# EAGLE board Qwiic_Haptic_Driver_DA7280-Panel (EAGLE 9.6.2), part 1 of 5
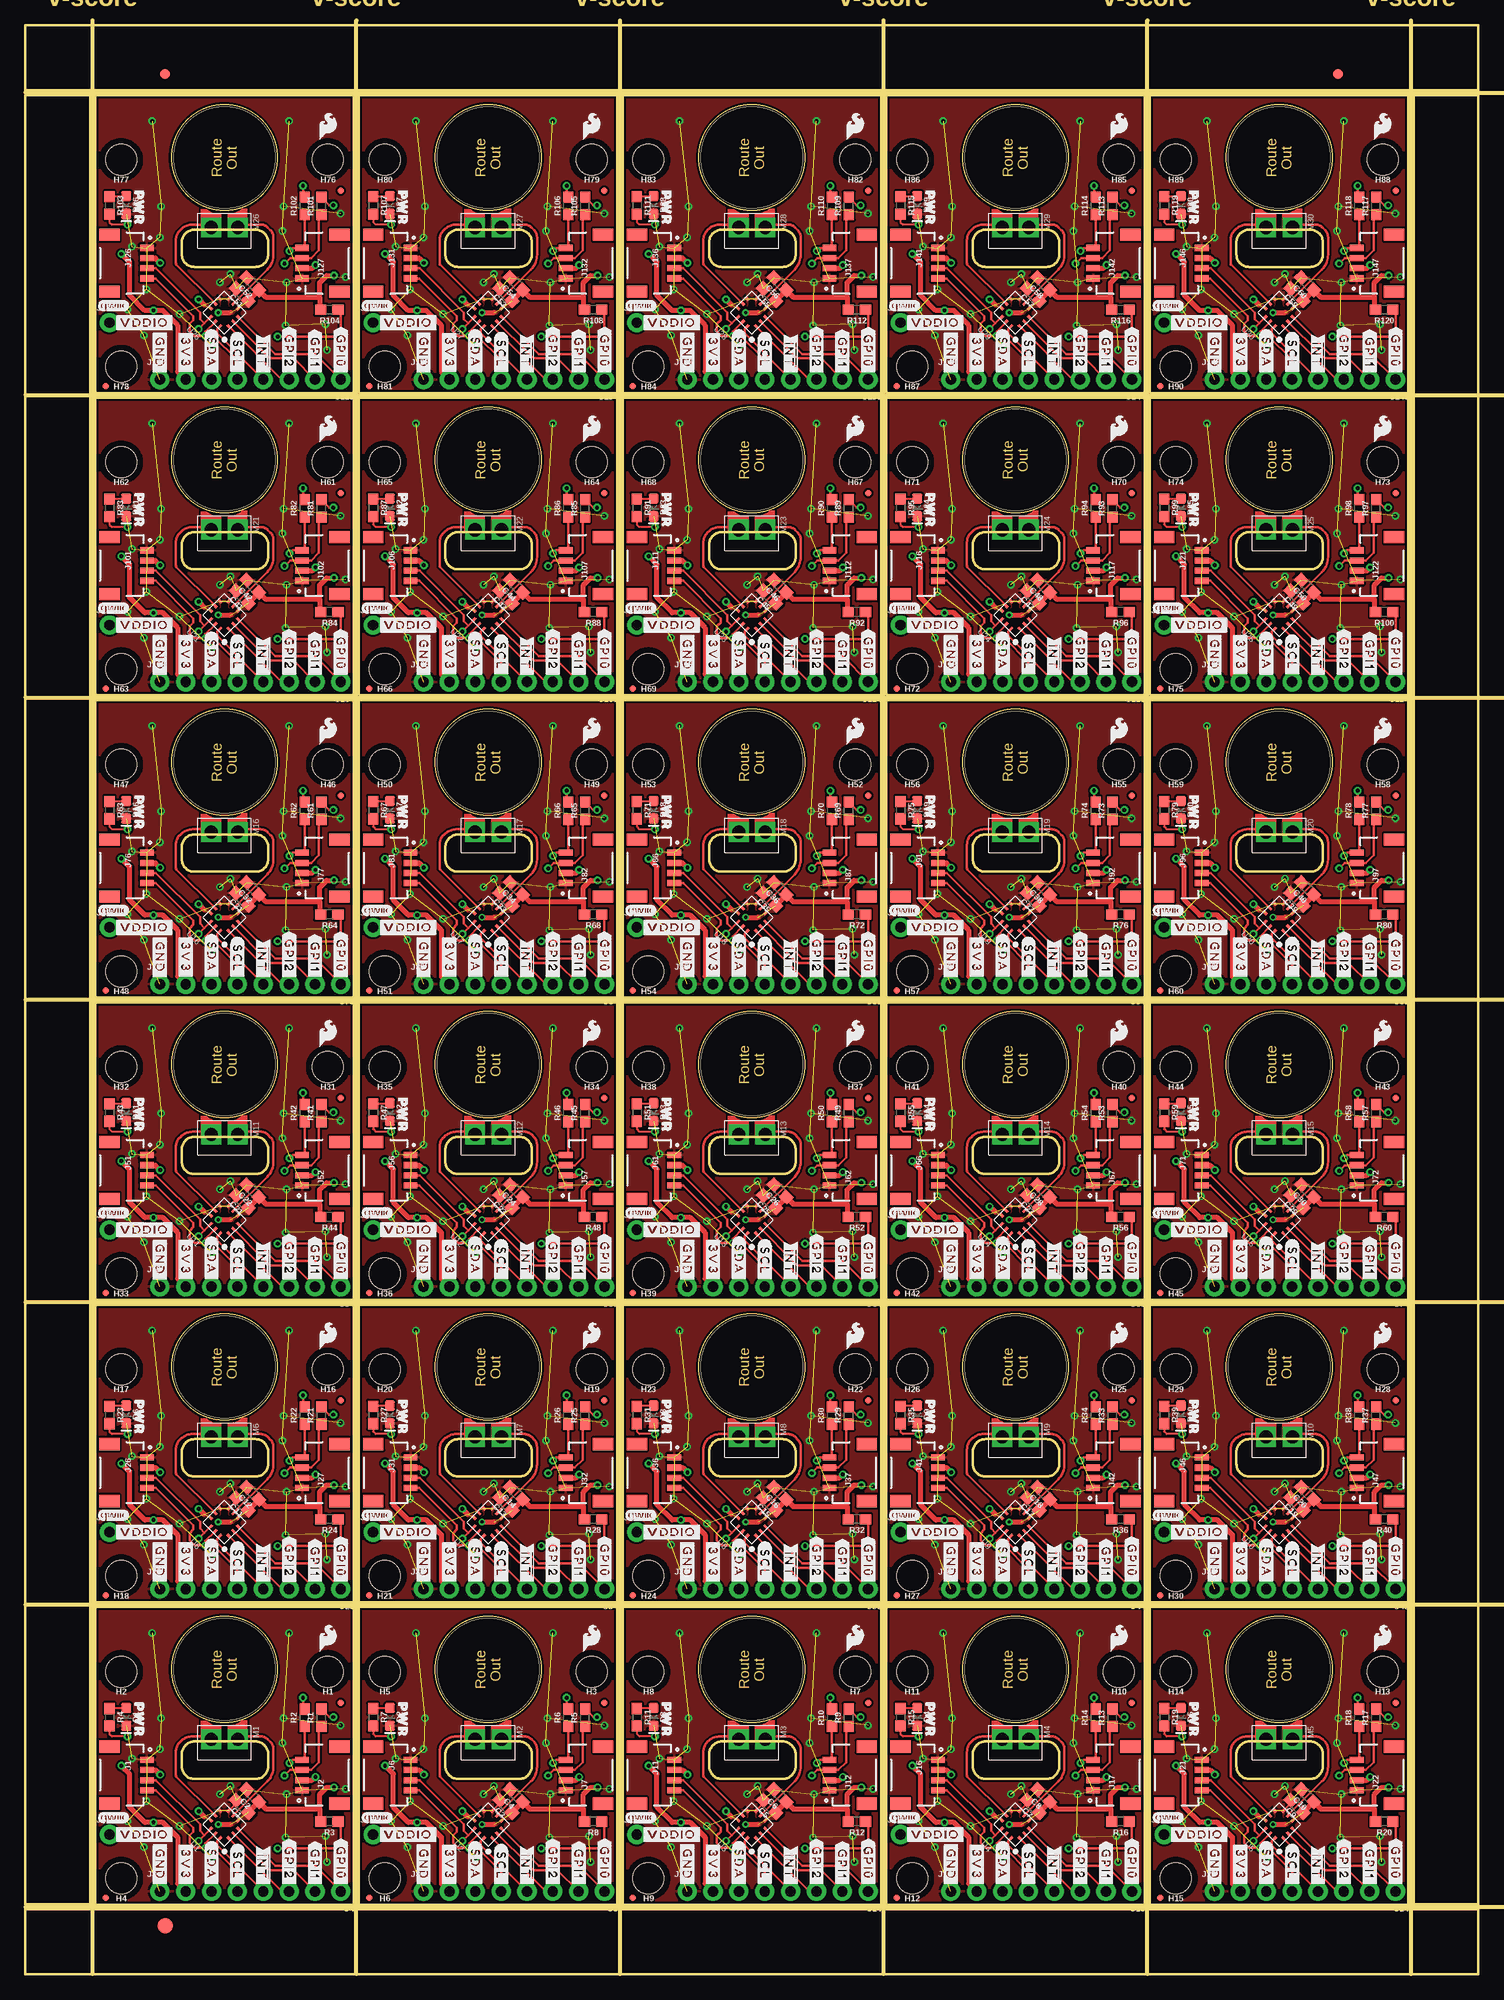
[diagram p0: board, top side]
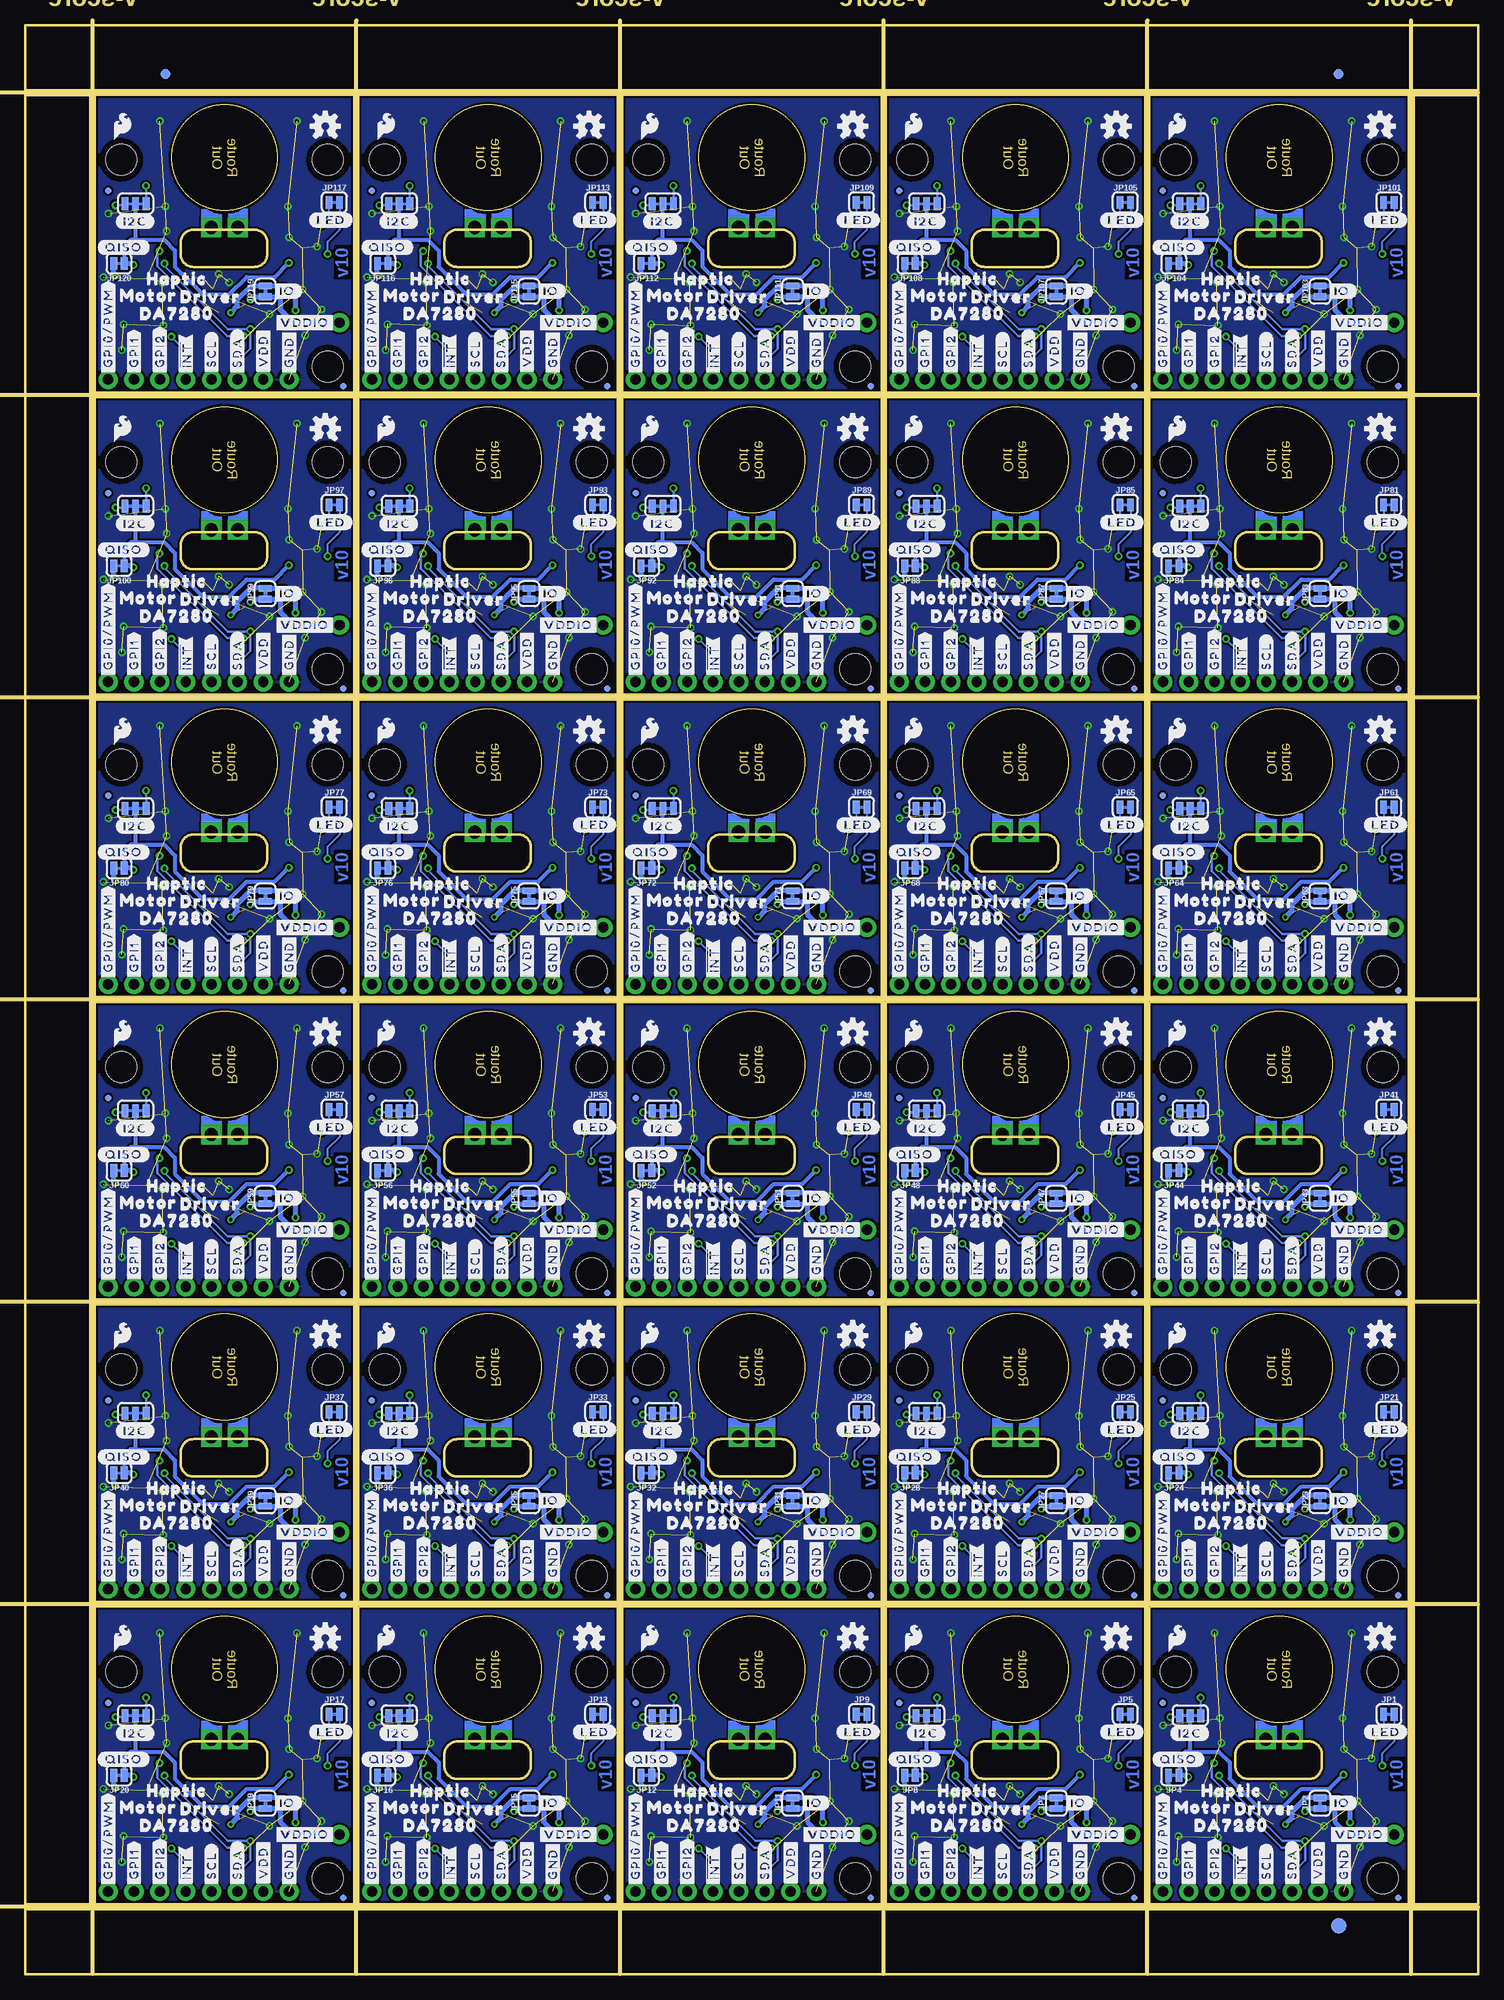
[diagram p1: board, bottom side, seen from below]

Size 142.75 x 191.52 mm. Coordinates in mm from the lower left corner, seen from the top.
Outline: 376 segments
Copper layers (1*16): Top 0.035mm / dielectric 1.5mm / Bottom 0.035mm
Design rules "Qwiic_Haptic_Driver_DA7280": minimum track width 7mil, minimum drill 15mil, track to track 7mil, track to pad 7mil, pad to pad 7mil, via to via 7mil, smd to smd 7mil, copper to edge 7mil, drill to drill 7mil, minimum pad ring 7mil, minimum via ring 7mil, stop-mask expansion 4mil, vias tented up to drill 25mil, thermal gap 10mil
tRestrict: area 19.4,15.2 to 19.7,15.3; area 22.4,18.7 to 22.6,18.8; area 45.3,15.2 to 45.6,15.3; area 48.3,18.7 to 48.5,18.8; area 71.2,15.2 to 71.6,15.3; area 74.2,18.7 to 74.4,18.8; area 97.1,15.2 to 97.5,15.3; area 100.1,18.7 to 100.3,18.8; area 123,15.2 to 123.4,15.3; area 126,18.7 to 126.2,18.8; area 19.4,44.9 to 19.7,45.1; area 22.4,48.4 to 22.6,48.6; 48 more areas
Milling: 13 lines

## Footprints (pad centres in the part's own frame; a part is rotated, then mirrored left to right if it is on the bottom)
0603 = smd 1.1 x 1: 1 -0.85,0; 2 0.85,0
LED-0603 = smd 1 x 1: A -0.877,0; C 0.877,0
FIDUCIAL-1X2 = smd 1 x 1: 1 0,0
FIDUCIAL-1.5X3 = smd 1.5 x 1.5: 1 0,0
FIDUCIAL-MICRO = smd 0.635 x 0.635: 1 0,0
STAND-OFF-TIGHT = hole 3.048: 0,0
JST04_1MM_RA = smd 0.6 x 1.35: 1 -1.5,0; 2 -0.5,0; 3 0.5,0; 4 1.5,0 | smd 1.2 x 2: NC1 2.8,-3.675; NC2 -2.8,-3.675
1X04_NO_SILK = drill 1.016 pad 1.88: 1 0,0; 2 2.54,0; 3 5.08,0; 4 7.62,0
1X01_NO_SILK = drill 1.016 pad 1.88: 1 0,0
SMT-JUMPER_2_NC_TRACE_SILK = smd 0.66 x 1.27: 1 -0.521,0; 2 0.521,0
SMT-JUMPER_3_2-NC_TRACE_SILK = smd 0.66 x 1.27: 1 -1.041,0; 2 0,0; 3 1.041,0
COIN_VIBRATION_MOTOR_CASTEL = drill 1.3 square: P$1 6.87,1.31; P$2 6.87,-1.29
QFN_DA7280 = smd 0.5 x 0.25: P1 -1.32,0.68; P2 -1.32,0.03; P3 -1.32,-0.62; P7 1.28,-0.62; P8 1.28,0.03; P9 1.28,0.68 | smd 0.25 x 0.5: P4 -0.67,-1.27; P5 -0.02,-1.27; P6 0.63,-1.27; P10 0.63,1.33; P11 -0.02,1.33; P12 -0.67,1.33

## Placement (x,y rotation side)
C1  0.1uF  [0603]  21.3,16.48 135 top
C2  4.7uF  [0603]  22.34,17.53 135 top
C3  0.1uF  [0603]  47.21,16.48 135 top
C4  4.7uF  [0603]  48.25,17.53 135 top
C5  0.1uF  [0603]  73.12,16.48 135 top
C6  4.7uF  [0603]  74.15,17.53 135 top
C7  0.1uF  [0603]  99.03,16.48 135 top
C8  4.7uF  [0603]  100.06,17.53 135 top
C9  0.1uF  [0603]  124.94,16.48 135 top
C10  4.7uF  [0603]  125.97,17.53 135 top
C11  0.1uF  [0603]  21.3,46.19 135 top
C12  4.7uF  [0603]  22.34,47.25 135 top
C13  0.1uF  [0603]  47.21,46.19 135 top
C14  4.7uF  [0603]  48.25,47.25 135 top
C15  0.1uF  [0603]  73.12,46.19 135 top
C16  4.7uF  [0603]  74.15,47.25 135 top
C17  0.1uF  [0603]  99.03,46.19 135 top
C18  4.7uF  [0603]  100.06,47.25 135 top
C19  0.1uF  [0603]  124.94,46.19 135 top
C20  4.7uF  [0603]  125.97,47.25 135 top
C21  0.1uF  [0603]  21.3,75.91 135 top
C22  4.7uF  [0603]  22.34,76.97 135 top
C23  0.1uF  [0603]  47.21,75.91 135 top
C24  4.7uF  [0603]  48.25,76.97 135 top
C25  0.1uF  [0603]  73.12,75.91 135 top
C26  4.7uF  [0603]  74.15,76.97 135 top
C27  0.1uF  [0603]  99.03,75.91 135 top
C28  4.7uF  [0603]  100.06,76.97 135 top
C29  0.1uF  [0603]  124.94,75.91 135 top
C30  4.7uF  [0603]  125.97,76.97 135 top
C31  0.1uF  [0603]  21.3,105.63 135 top
C32  4.7uF  [0603]  22.34,106.68 135 top
C33  0.1uF  [0603]  47.21,105.63 135 top
C34  4.7uF  [0603]  48.25,106.68 135 top
C35  0.1uF  [0603]  73.12,105.63 135 top
C36  4.7uF  [0603]  74.15,106.68 135 top
C37  0.1uF  [0603]  99.03,105.63 135 top
C38  4.7uF  [0603]  100.06,106.68 135 top
C39  0.1uF  [0603]  124.94,105.63 135 top
C40  4.7uF  [0603]  125.97,106.68 135 top
C41  0.1uF  [0603]  21.3,135.35 135 top
C42  4.7uF  [0603]  22.34,136.4 135 top
C43  0.1uF  [0603]  47.21,135.35 135 top
C44  4.7uF  [0603]  48.25,136.4 135 top
C45  0.1uF  [0603]  73.12,135.35 135 top
C46  4.7uF  [0603]  74.15,136.4 135 top
C47  0.1uF  [0603]  99.03,135.35 135 top
C48  4.7uF  [0603]  100.06,136.4 135 top
C49  0.1uF  [0603]  124.94,135.35 135 top
C50  4.7uF  [0603]  125.97,136.4 135 top
C51  0.1uF  [0603]  21.3,165.07 135 top
C52  4.7uF  [0603]  22.34,166.12 135 top
C53  0.1uF  [0603]  47.21,165.07 135 top
C54  4.7uF  [0603]  48.25,166.12 135 top
C55  0.1uF  [0603]  73.12,165.07 135 top
C56  4.7uF  [0603]  74.15,166.12 135 top
C57  0.1uF  [0603]  99.03,165.07 135 top
C58  4.7uF  [0603]  100.06,166.12 135 top
C59  0.1uF  [0603]  124.94,165.07 135 top
C60  4.7uF  [0603]  125.97,166.12 135 top
D1  RED  [LED-0603]  9.91,25.27 270 top
D2  RED  [LED-0603]  35.81,25.27 270 top
D3  RED  [LED-0603]  61.72,25.27 270 top
D4  RED  [LED-0603]  87.63,25.27 270 top
D5  RED  [LED-0603]  113.54,25.27 270 top
D6  RED  [LED-0603]  9.91,54.99 270 top
D7  RED  [LED-0603]  35.81,54.99 270 top
D8  RED  [LED-0603]  61.72,54.99 270 top
D9  RED  [LED-0603]  87.63,54.99 270 top
D10  RED  [LED-0603]  113.54,54.99 270 top
D11  RED  [LED-0603]  9.91,84.71 270 top
D12  RED  [LED-0603]  35.81,84.71 270 top
D13  RED  [LED-0603]  61.72,84.71 270 top
D14  RED  [LED-0603]  87.63,84.71 270 top
D15  RED  [LED-0603]  113.54,84.71 270 top
D16  RED  [LED-0603]  9.91,114.43 270 top
D17  RED  [LED-0603]  35.81,114.43 270 top
D18  RED  [LED-0603]  61.72,114.43 270 top
D19  RED  [LED-0603]  87.63,114.43 270 top
D20  RED  [LED-0603]  113.54,114.43 270 top
D21  RED  [LED-0603]  9.91,144.15 270 top
D22  RED  [LED-0603]  35.81,144.15 270 top
D23  RED  [LED-0603]  61.72,144.15 270 top
D24  RED  [LED-0603]  87.63,144.15 270 top
D25  RED  [LED-0603]  113.54,144.15 270 top
D26  RED  [LED-0603]  9.91,173.86 270 top
D27  RED  [LED-0603]  35.81,173.86 270 top
D28  RED  [LED-0603]  61.72,173.86 270 top
D29  RED  [LED-0603]  87.63,173.86 270 top
D30  RED  [LED-0603]  113.54,173.86 270 top
E$1  [FIDUCIAL-1X2]  13.72,186.75 0 top
E$2  [FIDUCIAL-1X2]  13.72,186.75 0 bottom
E$3  [FIDUCIAL-1X2]  128.97,186.75 0 top
E$4  [FIDUCIAL-1X2]  128.97,186.75 0 bottom
E$5  [FIDUCIAL-1.5X3]  13.72,4.76 0 top
E$6  [FIDUCIAL-1.5X3]  13.72,4.76 0 bottom
FD1  FIDUCIALUFIDUCIAL  [FIDUCIAL-MICRO]  7.87,7.49 180 top
FD2  FIDUCIALUFIDUCIAL  [FIDUCIAL-MICRO]  7.87,7.49 180 bottom
FD3  FIDUCIALUFIDUCIAL  [FIDUCIAL-MICRO]  30.99,26.67 180 top
FD4  FIDUCIALUFIDUCIAL  [FIDUCIAL-MICRO]  30.99,26.67 180 bottom
FD5  FIDUCIALUFIDUCIAL  [FIDUCIAL-MICRO]  33.78,7.49 180 top
FD6  FIDUCIALUFIDUCIAL  [FIDUCIAL-MICRO]  33.78,7.49 180 bottom
FD7  FIDUCIALUFIDUCIAL  [FIDUCIAL-MICRO]  56.9,26.67 180 top
FD8  FIDUCIALUFIDUCIAL  [FIDUCIAL-MICRO]  56.9,26.67 180 bottom
FD9  FIDUCIALUFIDUCIAL  [FIDUCIAL-MICRO]  59.69,7.49 180 top
FD10  FIDUCIALUFIDUCIAL  [FIDUCIAL-MICRO]  59.69,7.49 180 bottom
FD11  FIDUCIALUFIDUCIAL  [FIDUCIAL-MICRO]  82.8,26.67 180 top
FD12  FIDUCIALUFIDUCIAL  [FIDUCIAL-MICRO]  82.8,26.67 180 bottom
FD13  FIDUCIALUFIDUCIAL  [FIDUCIAL-MICRO]  85.6,7.49 180 top
FD14  FIDUCIALUFIDUCIAL  [FIDUCIAL-MICRO]  85.6,7.49 180 bottom
FD15  FIDUCIALUFIDUCIAL  [FIDUCIAL-MICRO]  108.71,26.67 180 top
FD16  FIDUCIALUFIDUCIAL  [FIDUCIAL-MICRO]  108.71,26.67 180 bottom
FD17  FIDUCIALUFIDUCIAL  [FIDUCIAL-MICRO]  111.51,7.49 180 top
FD18  FIDUCIALUFIDUCIAL  [FIDUCIAL-MICRO]  111.51,7.49 180 bottom
FD19  FIDUCIALUFIDUCIAL  [FIDUCIAL-MICRO]  134.62,26.67 180 top
FD20  FIDUCIALUFIDUCIAL  [FIDUCIAL-MICRO]  134.62,26.67 180 bottom
FD21  FIDUCIALUFIDUCIAL  [FIDUCIAL-MICRO]  7.87,37.21 180 top
FD22  FIDUCIALUFIDUCIAL  [FIDUCIAL-MICRO]  7.87,37.21 180 bottom
FD23  FIDUCIALUFIDUCIAL  [FIDUCIAL-MICRO]  30.99,56.39 180 top
FD24  FIDUCIALUFIDUCIAL  [FIDUCIAL-MICRO]  30.99,56.39 180 bottom
FD25  FIDUCIALUFIDUCIAL  [FIDUCIAL-MICRO]  33.78,37.21 180 top
FD26  FIDUCIALUFIDUCIAL  [FIDUCIAL-MICRO]  33.78,37.21 180 bottom
FD27  FIDUCIALUFIDUCIAL  [FIDUCIAL-MICRO]  56.9,56.39 180 top
FD28  FIDUCIALUFIDUCIAL  [FIDUCIAL-MICRO]  56.9,56.39 180 bottom
FD29  FIDUCIALUFIDUCIAL  [FIDUCIAL-MICRO]  59.69,37.21 180 top
FD30  FIDUCIALUFIDUCIAL  [FIDUCIAL-MICRO]  59.69,37.21 180 bottom
FD31  FIDUCIALUFIDUCIAL  [FIDUCIAL-MICRO]  82.8,56.39 180 top
FD32  FIDUCIALUFIDUCIAL  [FIDUCIAL-MICRO]  82.8,56.39 180 bottom
FD33  FIDUCIALUFIDUCIAL  [FIDUCIAL-MICRO]  85.6,37.21 180 top
FD34  FIDUCIALUFIDUCIAL  [FIDUCIAL-MICRO]  85.6,37.21 180 bottom
FD35  FIDUCIALUFIDUCIAL  [FIDUCIAL-MICRO]  108.71,56.39 180 top
FD36  FIDUCIALUFIDUCIAL  [FIDUCIAL-MICRO]  108.71,56.39 180 bottom
FD37  FIDUCIALUFIDUCIAL  [FIDUCIAL-MICRO]  111.51,37.21 180 top
FD38  FIDUCIALUFIDUCIAL  [FIDUCIAL-MICRO]  111.51,37.21 180 bottom
FD39  FIDUCIALUFIDUCIAL  [FIDUCIAL-MICRO]  134.62,56.39 180 top
FD40  FIDUCIALUFIDUCIAL  [FIDUCIAL-MICRO]  134.62,56.39 180 bottom
FD41  FIDUCIALUFIDUCIAL  [FIDUCIAL-MICRO]  7.87,66.93 180 top
FD42  FIDUCIALUFIDUCIAL  [FIDUCIAL-MICRO]  7.87,66.93 180 bottom
FD43  FIDUCIALUFIDUCIAL  [FIDUCIAL-MICRO]  30.99,86.11 180 top
FD44  FIDUCIALUFIDUCIAL  [FIDUCIAL-MICRO]  30.99,86.11 180 bottom
FD45  FIDUCIALUFIDUCIAL  [FIDUCIAL-MICRO]  33.78,66.93 180 top
FD46  FIDUCIALUFIDUCIAL  [FIDUCIAL-MICRO]  33.78,66.93 180 bottom
FD47  FIDUCIALUFIDUCIAL  [FIDUCIAL-MICRO]  56.9,86.11 180 top
FD48  FIDUCIALUFIDUCIAL  [FIDUCIAL-MICRO]  56.9,86.11 180 bottom
FD49  FIDUCIALUFIDUCIAL  [FIDUCIAL-MICRO]  59.69,66.93 180 top
FD50  FIDUCIALUFIDUCIAL  [FIDUCIAL-MICRO]  59.69,66.93 180 bottom
FD51  FIDUCIALUFIDUCIAL  [FIDUCIAL-MICRO]  82.8,86.11 180 top
FD52  FIDUCIALUFIDUCIAL  [FIDUCIAL-MICRO]  82.8,86.11 180 bottom
FD53  FIDUCIALUFIDUCIAL  [FIDUCIAL-MICRO]  85.6,66.93 180 top
FD54  FIDUCIALUFIDUCIAL  [FIDUCIAL-MICRO]  85.6,66.93 180 bottom
FD55  FIDUCIALUFIDUCIAL  [FIDUCIAL-MICRO]  108.71,86.11 180 top
FD56  FIDUCIALUFIDUCIAL  [FIDUCIAL-MICRO]  108.71,86.11 180 bottom
FD57  FIDUCIALUFIDUCIAL  [FIDUCIAL-MICRO]  111.51,66.93 180 top
FD58  FIDUCIALUFIDUCIAL  [FIDUCIAL-MICRO]  111.51,66.93 180 bottom
FD59  FIDUCIALUFIDUCIAL  [FIDUCIAL-MICRO]  134.62,86.11 180 top
FD60  FIDUCIALUFIDUCIAL  [FIDUCIAL-MICRO]  134.62,86.11 180 bottom
FD61  FIDUCIALUFIDUCIAL  [FIDUCIAL-MICRO]  7.87,96.65 180 top
FD62  FIDUCIALUFIDUCIAL  [FIDUCIAL-MICRO]  7.87,96.65 180 bottom
FD63  FIDUCIALUFIDUCIAL  [FIDUCIAL-MICRO]  30.99,115.82 180 top
FD64  FIDUCIALUFIDUCIAL  [FIDUCIAL-MICRO]  30.99,115.82 180 bottom
FD65  FIDUCIALUFIDUCIAL  [FIDUCIAL-MICRO]  33.78,96.65 180 top
FD66  FIDUCIALUFIDUCIAL  [FIDUCIAL-MICRO]  33.78,96.65 180 bottom
FD67  FIDUCIALUFIDUCIAL  [FIDUCIAL-MICRO]  56.9,115.82 180 top
FD68  FIDUCIALUFIDUCIAL  [FIDUCIAL-MICRO]  56.9,115.82 180 bottom
FD69  FIDUCIALUFIDUCIAL  [FIDUCIAL-MICRO]  59.69,96.65 180 top
FD70  FIDUCIALUFIDUCIAL  [FIDUCIAL-MICRO]  59.69,96.65 180 bottom
FD71  FIDUCIALUFIDUCIAL  [FIDUCIAL-MICRO]  82.8,115.82 180 top
FD72  FIDUCIALUFIDUCIAL  [FIDUCIAL-MICRO]  82.8,115.82 180 bottom
FD73  FIDUCIALUFIDUCIAL  [FIDUCIAL-MICRO]  85.6,96.65 180 top
FD74  FIDUCIALUFIDUCIAL  [FIDUCIAL-MICRO]  85.6,96.65 180 bottom
FD75  FIDUCIALUFIDUCIAL  [FIDUCIAL-MICRO]  108.71,115.82 180 top
FD76  FIDUCIALUFIDUCIAL  [FIDUCIAL-MICRO]  108.71,115.82 180 bottom
FD77  FIDUCIALUFIDUCIAL  [FIDUCIAL-MICRO]  111.51,96.65 180 top
FD78  FIDUCIALUFIDUCIAL  [FIDUCIAL-MICRO]  111.51,96.65 180 bottom
FD79  FIDUCIALUFIDUCIAL  [FIDUCIAL-MICRO]  134.62,115.82 180 top
FD80  FIDUCIALUFIDUCIAL  [FIDUCIAL-MICRO]  134.62,115.82 180 bottom
FD81  FIDUCIALUFIDUCIAL  [FIDUCIAL-MICRO]  7.87,126.37 180 top
FD82  FIDUCIALUFIDUCIAL  [FIDUCIAL-MICRO]  7.87,126.37 180 bottom
FD83  FIDUCIALUFIDUCIAL  [FIDUCIAL-MICRO]  30.99,145.54 180 top
FD84  FIDUCIALUFIDUCIAL  [FIDUCIAL-MICRO]  30.99,145.54 180 bottom
FD85  FIDUCIALUFIDUCIAL  [FIDUCIAL-MICRO]  33.78,126.37 180 top
FD86  FIDUCIALUFIDUCIAL  [FIDUCIAL-MICRO]  33.78,126.37 180 bottom
FD87  FIDUCIALUFIDUCIAL  [FIDUCIAL-MICRO]  56.9,145.54 180 top
FD88  FIDUCIALUFIDUCIAL  [FIDUCIAL-MICRO]  56.9,145.54 180 bottom
FD89  FIDUCIALUFIDUCIAL  [FIDUCIAL-MICRO]  59.69,126.37 180 top
FD90  FIDUCIALUFIDUCIAL  [FIDUCIAL-MICRO]  59.69,126.37 180 bottom
FD91  FIDUCIALUFIDUCIAL  [FIDUCIAL-MICRO]  82.8,145.54 180 top
FD92  FIDUCIALUFIDUCIAL  [FIDUCIAL-MICRO]  82.8,145.54 180 bottom
FD93  FIDUCIALUFIDUCIAL  [FIDUCIAL-MICRO]  85.6,126.37 180 top
FD94  FIDUCIALUFIDUCIAL  [FIDUCIAL-MICRO]  85.6,126.37 180 bottom
FD95  FIDUCIALUFIDUCIAL  [FIDUCIAL-MICRO]  108.71,145.54 180 top
FD96  FIDUCIALUFIDUCIAL  [FIDUCIAL-MICRO]  108.71,145.54 180 bottom
FD97  FIDUCIALUFIDUCIAL  [FIDUCIAL-MICRO]  111.51,126.37 180 top
FD98  FIDUCIALUFIDUCIAL  [FIDUCIAL-MICRO]  111.51,126.37 180 bottom
FD99  FIDUCIALUFIDUCIAL  [FIDUCIAL-MICRO]  134.62,145.54 180 top
FD100  FIDUCIALUFIDUCIAL  [FIDUCIAL-MICRO]  134.62,145.54 180 bottom
FD101  FIDUCIALUFIDUCIAL  [FIDUCIAL-MICRO]  7.87,156.08 180 top
FD102  FIDUCIALUFIDUCIAL  [FIDUCIAL-MICRO]  7.87,156.08 180 bottom
FD103  FIDUCIALUFIDUCIAL  [FIDUCIAL-MICRO]  30.99,175.26 180 top
FD104  FIDUCIALUFIDUCIAL  [FIDUCIAL-MICRO]  30.99,175.26 180 bottom
FD105  FIDUCIALUFIDUCIAL  [FIDUCIAL-MICRO]  33.78,156.08 180 top
FD106  FIDUCIALUFIDUCIAL  [FIDUCIAL-MICRO]  33.78,156.08 180 bottom
FD107  FIDUCIALUFIDUCIAL  [FIDUCIAL-MICRO]  56.9,175.26 180 top
FD108  FIDUCIALUFIDUCIAL  [FIDUCIAL-MICRO]  56.9,175.26 180 bottom
FD109  FIDUCIALUFIDUCIAL  [FIDUCIAL-MICRO]  59.69,156.08 180 top
FD110  FIDUCIALUFIDUCIAL  [FIDUCIAL-MICRO]  59.69,156.08 180 bottom
FD111  FIDUCIALUFIDUCIAL  [FIDUCIAL-MICRO]  82.8,175.26 180 top
FD112  FIDUCIALUFIDUCIAL  [FIDUCIAL-MICRO]  82.8,175.26 180 bottom
FD113  FIDUCIALUFIDUCIAL  [FIDUCIAL-MICRO]  85.6,156.08 180 top
FD114  FIDUCIALUFIDUCIAL  [FIDUCIAL-MICRO]  85.6,156.08 180 bottom
FD115  FIDUCIALUFIDUCIAL  [FIDUCIAL-MICRO]  108.71,175.26 180 top
FD116  FIDUCIALUFIDUCIAL  [FIDUCIAL-MICRO]  108.71,175.26 180 bottom
FD117  FIDUCIALUFIDUCIAL  [FIDUCIAL-MICRO]  111.51,156.08 180 top
FD118  FIDUCIALUFIDUCIAL  [FIDUCIAL-MICRO]  111.51,156.08 180 bottom
FD119  FIDUCIALUFIDUCIAL  [FIDUCIAL-MICRO]  134.62,175.26 180 top
FD120  FIDUCIALUFIDUCIAL  [FIDUCIAL-MICRO]  134.62,175.26 180 bottom
H1  STAND-OFFTIGHT  [STAND-OFF-TIGHT]  29.72,29.72 180 top
H2  STAND-OFFTIGHT  [STAND-OFF-TIGHT]  9.4,29.72 180 top
H3  STAND-OFFTIGHT  [STAND-OFF-TIGHT]  55.63,29.72 180 top
H4  STAND-OFFTIGHT  [STAND-OFF-TIGHT]  9.4,9.4 180 top
H5  STAND-OFFTIGHT  [STAND-OFF-TIGHT]  35.31,29.72 180 top
H6  STAND-OFFTIGHT  [STAND-OFF-TIGHT]  35.31,9.4 180 top
H7  STAND-OFFTIGHT  [STAND-OFF-TIGHT]  81.53,29.72 180 top
H8  STAND-OFFTIGHT  [STAND-OFF-TIGHT]  61.21,29.72 180 top
H9  STAND-OFFTIGHT  [STAND-OFF-TIGHT]  61.21,9.4 180 top
H10  STAND-OFFTIGHT  [STAND-OFF-TIGHT]  107.44,29.72 180 top
H11  STAND-OFFTIGHT  [STAND-OFF-TIGHT]  87.12,29.72 180 top
H12  STAND-OFFTIGHT  [STAND-OFF-TIGHT]  87.12,9.4 180 top
H13  STAND-OFFTIGHT  [STAND-OFF-TIGHT]  133.35,29.72 180 top
H14  STAND-OFFTIGHT  [STAND-OFF-TIGHT]  113.03,29.72 180 top
H15  STAND-OFFTIGHT  [STAND-OFF-TIGHT]  113.03,9.4 180 top
H16  STAND-OFFTIGHT  [STAND-OFF-TIGHT]  29.72,59.44 180 top
H17  STAND-OFFTIGHT  [STAND-OFF-TIGHT]  9.4,59.44 180 top
H18  STAND-OFFTIGHT  [STAND-OFF-TIGHT]  9.4,39.12 180 top
H19  STAND-OFFTIGHT  [STAND-OFF-TIGHT]  55.63,59.44 180 top
H20  STAND-OFFTIGHT  [STAND-OFF-TIGHT]  35.31,59.44 180 top
H21  STAND-OFFTIGHT  [STAND-OFF-TIGHT]  35.31,39.12 180 top
H22  STAND-OFFTIGHT  [STAND-OFF-TIGHT]  81.53,59.44 180 top
H23  STAND-OFFTIGHT  [STAND-OFF-TIGHT]  61.21,59.44 180 top
H24  STAND-OFFTIGHT  [STAND-OFF-TIGHT]  61.21,39.12 180 top
H25  STAND-OFFTIGHT  [STAND-OFF-TIGHT]  107.44,59.44 180 top
H26  STAND-OFFTIGHT  [STAND-OFF-TIGHT]  87.12,59.44 180 top
H27  STAND-OFFTIGHT  [STAND-OFF-TIGHT]  87.12,39.12 180 top
H28  STAND-OFFTIGHT  [STAND-OFF-TIGHT]  133.35,59.44 180 top
H29  STAND-OFFTIGHT  [STAND-OFF-TIGHT]  113.03,59.44 180 top
H30  STAND-OFFTIGHT  [STAND-OFF-TIGHT]  113.03,39.12 180 top
H31  STAND-OFFTIGHT  [STAND-OFF-TIGHT]  29.72,89.15 180 top
H32  STAND-OFFTIGHT  [STAND-OFF-TIGHT]  9.4,89.15 180 top
H33  STAND-OFFTIGHT  [STAND-OFF-TIGHT]  9.4,68.83 180 top
H34  STAND-OFFTIGHT  [STAND-OFF-TIGHT]  55.63,89.15 180 top
H35  STAND-OFFTIGHT  [STAND-OFF-TIGHT]  35.31,89.15 180 top
H36  STAND-OFFTIGHT  [STAND-OFF-TIGHT]  35.31,68.83 180 top
H37  STAND-OFFTIGHT  [STAND-OFF-TIGHT]  81.53,89.15 180 top
H38  STAND-OFFTIGHT  [STAND-OFF-TIGHT]  61.21,89.15 180 top
H39  STAND-OFFTIGHT  [STAND-OFF-TIGHT]  61.21,68.83 180 top
H40  STAND-OFFTIGHT  [STAND-OFF-TIGHT]  107.44,89.15 180 top
H41  STAND-OFFTIGHT  [STAND-OFF-TIGHT]  87.12,89.15 180 top
H42  STAND-OFFTIGHT  [STAND-OFF-TIGHT]  87.12,68.83 180 top
H43  STAND-OFFTIGHT  [STAND-OFF-TIGHT]  133.35,89.15 180 top
H44  STAND-OFFTIGHT  [STAND-OFF-TIGHT]  113.03,89.15 180 top
H45  STAND-OFFTIGHT  [STAND-OFF-TIGHT]  113.03,68.83 180 top
H46  STAND-OFFTIGHT  [STAND-OFF-TIGHT]  29.72,118.87 180 top
H47  STAND-OFFTIGHT  [STAND-OFF-TIGHT]  9.4,118.87 180 top
H48  STAND-OFFTIGHT  [STAND-OFF-TIGHT]  9.4,98.55 180 top
H49  STAND-OFFTIGHT  [STAND-OFF-TIGHT]  55.63,118.87 180 top
H50  STAND-OFFTIGHT  [STAND-OFF-TIGHT]  35.31,118.87 180 top
H51  STAND-OFFTIGHT  [STAND-OFF-TIGHT]  35.31,98.55 180 top
H52  STAND-OFFTIGHT  [STAND-OFF-TIGHT]  81.53,118.87 180 top
H53  STAND-OFFTIGHT  [STAND-OFF-TIGHT]  61.21,118.87 180 top
H54  STAND-OFFTIGHT  [STAND-OFF-TIGHT]  61.21,98.55 180 top
H55  STAND-OFFTIGHT  [STAND-OFF-TIGHT]  107.44,118.87 180 top
H56  STAND-OFFTIGHT  [STAND-OFF-TIGHT]  87.12,118.87 180 top
H57  STAND-OFFTIGHT  [STAND-OFF-TIGHT]  87.12,98.55 180 top
H58  STAND-OFFTIGHT  [STAND-OFF-TIGHT]  133.35,118.87 180 top
H59  STAND-OFFTIGHT  [STAND-OFF-TIGHT]  113.03,118.87 180 top
H60  STAND-OFFTIGHT  [STAND-OFF-TIGHT]  113.03,98.55 180 top
H61  STAND-OFFTIGHT  [STAND-OFF-TIGHT]  29.72,148.59 180 top
H62  STAND-OFFTIGHT  [STAND-OFF-TIGHT]  9.4,148.59 180 top
H63  STAND-OFFTIGHT  [STAND-OFF-TIGHT]  9.4,128.27 180 top
H64  STAND-OFFTIGHT  [STAND-OFF-TIGHT]  55.63,148.59 180 top
H65  STAND-OFFTIGHT  [STAND-OFF-TIGHT]  35.31,148.59 180 top
H66  STAND-OFFTIGHT  [STAND-OFF-TIGHT]  35.31,128.27 180 top
H67  STAND-OFFTIGHT  [STAND-OFF-TIGHT]  81.53,148.59 180 top
H68  STAND-OFFTIGHT  [STAND-OFF-TIGHT]  61.21,148.59 180 top
H69  STAND-OFFTIGHT  [STAND-OFF-TIGHT]  61.21,128.27 180 top
H70  STAND-OFFTIGHT  [STAND-OFF-TIGHT]  107.44,148.59 180 top
H71  STAND-OFFTIGHT  [STAND-OFF-TIGHT]  87.12,148.59 180 top
H72  STAND-OFFTIGHT  [STAND-OFF-TIGHT]  87.12,128.27 180 top
H73  STAND-OFFTIGHT  [STAND-OFF-TIGHT]  133.35,148.59 180 top
H74  STAND-OFFTIGHT  [STAND-OFF-TIGHT]  113.03,148.59 180 top
H75  STAND-OFFTIGHT  [STAND-OFF-TIGHT]  113.03,128.27 180 top
H76  STAND-OFFTIGHT  [STAND-OFF-TIGHT]  29.72,178.31 180 top
H77  STAND-OFFTIGHT  [STAND-OFF-TIGHT]  9.4,178.31 180 top
H78  STAND-OFFTIGHT  [STAND-OFF-TIGHT]  9.4,157.99 180 top
H79  STAND-OFFTIGHT  [STAND-OFF-TIGHT]  55.63,178.31 180 top
H80  STAND-OFFTIGHT  [STAND-OFF-TIGHT]  35.31,178.31 180 top
H81  STAND-OFFTIGHT  [STAND-OFF-TIGHT]  35.31,157.99 180 top
H82  STAND-OFFTIGHT  [STAND-OFF-TIGHT]  81.53,178.31 180 top
H83  STAND-OFFTIGHT  [STAND-OFF-TIGHT]  61.21,178.31 180 top
H84  STAND-OFFTIGHT  [STAND-OFF-TIGHT]  61.21,157.99 180 top
H85  STAND-OFFTIGHT  [STAND-OFF-TIGHT]  107.44,178.31 180 top
H86  STAND-OFFTIGHT  [STAND-OFF-TIGHT]  87.12,178.31 180 top
H87  STAND-OFFTIGHT  [STAND-OFF-TIGHT]  87.12,157.99 180 top
H88  STAND-OFFTIGHT  [STAND-OFF-TIGHT]  133.35,178.31 180 top
H89  STAND-OFFTIGHT  [STAND-OFF-TIGHT]  113.03,178.31 180 top
H90  STAND-OFFTIGHT  [STAND-OFF-TIGHT]  113.03,157.99 180 top
J1  QWIIC_RIGHT_ANGLE  [JST04_1MM_RA]  11.94,19.56 270 top
J2  QWIIC_RIGHT_ANGLE  [JST04_1MM_RA]  27.18,19.56 90 top
J3  [1X04_NO_SILK]  13.21,8.13 0 top
J4  [1X04_NO_SILK]  30.99,8.13 180 top
J5  [1X01_NO_SILK]  8.25,13.72 0 top
J6  QWIIC_RIGHT_ANGLE  [JST04_1MM_RA]  37.85,19.56 270 top
J7  QWIIC_RIGHT_ANGLE  [JST04_1MM_RA]  53.09,19.56 90 top
J8  [1X04_NO_SILK]  39.12,8.13 0 top
J9  [1X04_NO_SILK]  56.9,8.13 180 top
J10  [1X01_NO_SILK]  34.16,13.72 0 top
J11  QWIIC_RIGHT_ANGLE  [JST04_1MM_RA]  63.75,19.56 270 top
J12  QWIIC_RIGHT_ANGLE  [JST04_1MM_RA]  78.99,19.56 90 top
J13  [1X04_NO_SILK]  65.02,8.13 0 top
J14  [1X04_NO_SILK]  82.8,8.13 180 top
J15  [1X01_NO_SILK]  60.07,13.72 0 top
J16  QWIIC_RIGHT_ANGLE  [JST04_1MM_RA]  89.66,19.56 270 top
J17  QWIIC_RIGHT_ANGLE  [JST04_1MM_RA]  104.9,19.56 90 top
J18  [1X04_NO_SILK]  90.93,8.13 0 top
J19  [1X04_NO_SILK]  108.71,8.13 180 top
J20  [1X01_NO_SILK]  85.98,13.72 0 top
J21  QWIIC_RIGHT_ANGLE  [JST04_1MM_RA]  115.57,19.56 270 top
J22  QWIIC_RIGHT_ANGLE  [JST04_1MM_RA]  130.81,19.56 90 top
J23  [1X04_NO_SILK]  116.84,8.13 0 top
J24  [1X04_NO_SILK]  134.62,8.13 180 top
J25  [1X01_NO_SILK]  111.89,13.72 0 top
J26  QWIIC_RIGHT_ANGLE  [JST04_1MM_RA]  11.94,49.28 270 top
J27  QWIIC_RIGHT_ANGLE  [JST04_1MM_RA]  27.18,49.28 90 top
J28  [1X04_NO_SILK]  13.21,37.85 0 top
J29  [1X04_NO_SILK]  30.99,37.85 180 top
J30  [1X01_NO_SILK]  8.25,43.43 0 top
J31  QWIIC_RIGHT_ANGLE  [JST04_1MM_RA]  37.85,49.28 270 top
J32  QWIIC_RIGHT_ANGLE  [JST04_1MM_RA]  53.09,49.28 90 top
J33  [1X04_NO_SILK]  39.12,37.85 0 top
J34  [1X04_NO_SILK]  56.9,37.85 180 top
J35  [1X01_NO_SILK]  34.16,43.43 0 top
J36  QWIIC_RIGHT_ANGLE  [JST04_1MM_RA]  63.75,49.28 270 top
J37  QWIIC_RIGHT_ANGLE  [JST04_1MM_RA]  78.99,49.28 90 top
J38  [1X04_NO_SILK]  65.02,37.85 0 top
J39  [1X04_NO_SILK]  82.8,37.85 180 top
J40  [1X01_NO_SILK]  60.07,43.43 0 top
J41  QWIIC_RIGHT_ANGLE  [JST04_1MM_RA]  89.66,49.28 270 top
J42  QWIIC_RIGHT_ANGLE  [JST04_1MM_RA]  104.9,49.28 90 top
J43  [1X04_NO_SILK]  90.93,37.85 0 top
J44  [1X04_NO_SILK]  108.71,37.85 180 top
J45  [1X01_NO_SILK]  85.98,43.43 0 top
J46  QWIIC_RIGHT_ANGLE  [JST04_1MM_RA]  115.57,49.28 270 top
J47  QWIIC_RIGHT_ANGLE  [JST04_1MM_RA]  130.81,49.28 90 top
J48  [1X04_NO_SILK]  116.84,37.85 0 top
J49  [1X04_NO_SILK]  134.62,37.85 180 top
J50  [1X01_NO_SILK]  111.89,43.43 0 top
J51  QWIIC_RIGHT_ANGLE  [JST04_1MM_RA]  11.94,78.99 270 top
J52  QWIIC_RIGHT_ANGLE  [JST04_1MM_RA]  27.18,78.99 90 top
J53  [1X04_NO_SILK]  13.21,67.56 0 top
J54  [1X04_NO_SILK]  30.99,67.56 180 top
J55  [1X01_NO_SILK]  8.25,73.15 0 top
J56  QWIIC_RIGHT_ANGLE  [JST04_1MM_RA]  37.85,78.99 270 top
J57  QWIIC_RIGHT_ANGLE  [JST04_1MM_RA]  53.09,78.99 90 top
J58  [1X04_NO_SILK]  39.12,67.56 0 top
J59  [1X04_NO_SILK]  56.9,67.56 180 top
J60  [1X01_NO_SILK]  34.16,73.15 0 top
J61  QWIIC_RIGHT_ANGLE  [JST04_1MM_RA]  63.75,78.99 270 top
J62  QWIIC_RIGHT_ANGLE  [JST04_1MM_RA]  78.99,78.99 90 top
J63  [1X04_NO_SILK]  65.02,67.56 0 top
J64  [1X04_NO_SILK]  82.8,67.56 180 top
J65  [1X01_NO_SILK]  60.07,73.15 0 top
J66  QWIIC_RIGHT_ANGLE  [JST04_1MM_RA]  89.66,78.99 270 top
J67  QWIIC_RIGHT_ANGLE  [JST04_1MM_RA]  104.9,78.99 90 top
J68  [1X04_NO_SILK]  90.93,67.56 0 top
J69  [1X04_NO_SILK]  108.71,67.56 180 top
J70  [1X01_NO_SILK]  85.98,73.15 0 top
J71  QWIIC_RIGHT_ANGLE  [JST04_1MM_RA]  115.57,78.99 270 top
J72  QWIIC_RIGHT_ANGLE  [JST04_1MM_RA]  130.81,78.99 90 top
J73  [1X04_NO_SILK]  116.84,67.56 0 top
J74  [1X04_NO_SILK]  134.62,67.56 180 top
J75  [1X01_NO_SILK]  111.89,73.15 0 top
J76  QWIIC_RIGHT_ANGLE  [JST04_1MM_RA]  11.94,108.71 270 top
J77  QWIIC_RIGHT_ANGLE  [JST04_1MM_RA]  27.18,108.71 90 top
J78  [1X04_NO_SILK]  13.21,97.28 0 top
J79  [1X04_NO_SILK]  30.99,97.28 180 top
J80  [1X01_NO_SILK]  8.25,102.87 0 top
J81  QWIIC_RIGHT_ANGLE  [JST04_1MM_RA]  37.85,108.71 270 top
J82  QWIIC_RIGHT_ANGLE  [JST04_1MM_RA]  53.09,108.71 90 top
J83  [1X04_NO_SILK]  39.12,97.28 0 top
J84  [1X04_NO_SILK]  56.9,97.28 180 top
J85  [1X01_NO_SILK]  34.16,102.87 0 top
J86  QWIIC_RIGHT_ANGLE  [JST04_1MM_RA]  63.75,108.71 270 top
J87  QWIIC_RIGHT_ANGLE  [JST04_1MM_RA]  78.99,108.71 90 top
J88  [1X04_NO_SILK]  65.02,97.28 0 top
J89  [1X04_NO_SILK]  82.8,97.28 180 top
J90  [1X01_NO_SILK]  60.07,102.87 0 top
J91  QWIIC_RIGHT_ANGLE  [JST04_1MM_RA]  89.66,108.71 270 top
J92  QWIIC_RIGHT_ANGLE  [JST04_1MM_RA]  104.9,108.71 90 top
J93  [1X04_NO_SILK]  90.93,97.28 0 top
J94  [1X04_NO_SILK]  108.71,97.28 180 top
J95  [1X01_NO_SILK]  85.98,102.87 0 top
J96  QWIIC_RIGHT_ANGLE  [JST04_1MM_RA]  115.57,108.71 270 top
J97  QWIIC_RIGHT_ANGLE  [JST04_1MM_RA]  130.81,108.71 90 top
J98  [1X04_NO_SILK]  116.84,97.28 0 top
J99  [1X04_NO_SILK]  134.62,97.28 180 top
J100  [1X01_NO_SILK]  111.89,102.87 0 top
J101  QWIIC_RIGHT_ANGLE  [JST04_1MM_RA]  11.94,138.43 270 top
J102  QWIIC_RIGHT_ANGLE  [JST04_1MM_RA]  27.18,138.43 90 top
J103  [1X04_NO_SILK]  13.21,127 0 top
J104  [1X04_NO_SILK]  30.99,127 180 top
J105  [1X01_NO_SILK]  8.25,132.59 0 top
J106  QWIIC_RIGHT_ANGLE  [JST04_1MM_RA]  37.85,138.43 270 top
J107  QWIIC_RIGHT_ANGLE  [JST04_1MM_RA]  53.09,138.43 90 top
J108  [1X04_NO_SILK]  39.12,127 0 top
J109  [1X04_NO_SILK]  56.9,127 180 top
J110  [1X01_NO_SILK]  34.16,132.59 0 top
J111  QWIIC_RIGHT_ANGLE  [JST04_1MM_RA]  63.75,138.43 270 top
J112  QWIIC_RIGHT_ANGLE  [JST04_1MM_RA]  78.99,138.43 90 top
J113  [1X04_NO_SILK]  65.02,127 0 top
J114  [1X04_NO_SILK]  82.8,127 180 top
J115  [1X01_NO_SILK]  60.07,132.59 0 top
J116  QWIIC_RIGHT_ANGLE  [JST04_1MM_RA]  89.66,138.43 270 top
J117  QWIIC_RIGHT_ANGLE  [JST04_1MM_RA]  104.9,138.43 90 top
J118  [1X04_NO_SILK]  90.93,127 0 top
J119  [1X04_NO_SILK]  108.71,127 180 top
J120  [1X01_NO_SILK]  85.98,132.59 0 top
J121  QWIIC_RIGHT_ANGLE  [JST04_1MM_RA]  115.57,138.43 270 top
J122  QWIIC_RIGHT_ANGLE  [JST04_1MM_RA]  130.81,138.43 90 top
J123  [1X04_NO_SILK]  116.84,127 0 top
J124  [1X04_NO_SILK]  134.62,127 180 top
J125  [1X01_NO_SILK]  111.89,132.59 0 top
J126  QWIIC_RIGHT_ANGLE  [JST04_1MM_RA]  11.94,168.15 270 top
J127  QWIIC_RIGHT_ANGLE  [JST04_1MM_RA]  27.18,168.15 90 top
J128  [1X04_NO_SILK]  13.21,156.72 0 top
J129  [1X04_NO_SILK]  30.99,156.72 180 top
J130  [1X01_NO_SILK]  8.25,162.31 0 top
J131  QWIIC_RIGHT_ANGLE  [JST04_1MM_RA]  37.85,168.15 270 top
J132  QWIIC_RIGHT_ANGLE  [JST04_1MM_RA]  53.09,168.15 90 top
J133  [1X04_NO_SILK]  39.12,156.72 0 top
J134  [1X04_NO_SILK]  56.9,156.72 180 top
J135  [1X01_NO_SILK]  34.16,162.31 0 top
J136  QWIIC_RIGHT_ANGLE  [JST04_1MM_RA]  63.75,168.15 270 top
J137  QWIIC_RIGHT_ANGLE  [JST04_1MM_RA]  78.99,168.15 90 top
J138  [1X04_NO_SILK]  65.02,156.72 0 top
J139  [1X04_NO_SILK]  82.8,156.72 180 top
J140  [1X01_NO_SILK]  60.07,162.31 0 top
J141  QWIIC_RIGHT_ANGLE  [JST04_1MM_RA]  89.66,168.15 270 top
J142  QWIIC_RIGHT_ANGLE  [JST04_1MM_RA]  104.9,168.15 90 top
J143  [1X04_NO_SILK]  90.93,156.72 0 top
J144  [1X04_NO_SILK]  108.71,156.72 180 top
J145  [1X01_NO_SILK]  85.98,162.31 0 top
J146  QWIIC_RIGHT_ANGLE  [JST04_1MM_RA]  115.57,168.15 270 top
J147  QWIIC_RIGHT_ANGLE  [JST04_1MM_RA]  130.81,168.15 90 top
J148  [1X04_NO_SILK]  116.84,156.72 0 top
J149  [1X04_NO_SILK]  134.62,156.72 180 top
J150  [1X01_NO_SILK]  111.89,162.31 0 top
JP1  LED  [SMT-JUMPER_2_NC_TRACE_SILK]  8.78,25.53 0 bottom
JP2  LED  [SMT-JUMPER_2_NC_TRACE_SILK]  15.54,16.79 90 bottom
JP3  I2C_PU  [SMT-JUMPER_3_2-NC_TRACE_SILK]  28.3,25.4 180 bottom
JP4  LED  [SMT-JUMPER_2_NC_TRACE_SILK]  29.92,19.53 180 bottom
JP5  LED  [SMT-JUMPER_2_NC_TRACE_SILK]  34.68,25.53 0 bottom
JP6  I2C_PU  [SMT-JUMPER_3_2-NC_TRACE_SILK]  54.2,25.4 180 bottom
JP7  LED  [SMT-JUMPER_2_NC_TRACE_SILK]  41.45,16.79 90 bottom
JP8  LED  [SMT-JUMPER_2_NC_TRACE_SILK]  55.83,19.53 180 bottom
JP9  LED  [SMT-JUMPER_2_NC_TRACE_SILK]  60.59,25.53 0 bottom
JP10  I2C_PU  [SMT-JUMPER_3_2-NC_TRACE_SILK]  80.11,25.4 180 bottom
JP11  LED  [SMT-JUMPER_2_NC_TRACE_SILK]  67.36,16.79 90 bottom
JP12  LED  [SMT-JUMPER_2_NC_TRACE_SILK]  81.74,19.53 180 bottom
JP13  LED  [SMT-JUMPER_2_NC_TRACE_SILK]  86.5,25.53 0 bottom
JP14  I2C_PU  [SMT-JUMPER_3_2-NC_TRACE_SILK]  106.02,25.4 180 bottom
JP15  LED  [SMT-JUMPER_2_NC_TRACE_SILK]  93.27,16.79 90 bottom
JP16  LED  [SMT-JUMPER_2_NC_TRACE_SILK]  107.65,19.53 180 bottom
JP17  LED  [SMT-JUMPER_2_NC_TRACE_SILK]  112.41,25.53 0 bottom
JP18  I2C_PU  [SMT-JUMPER_3_2-NC_TRACE_SILK]  131.93,25.4 180 bottom
JP19  LED  [SMT-JUMPER_2_NC_TRACE_SILK]  119.18,16.79 90 bottom
JP20  LED  [SMT-JUMPER_2_NC_TRACE_SILK]  133.55,19.53 180 bottom
JP21  LED  [SMT-JUMPER_2_NC_TRACE_SILK]  8.78,55.24 0 bottom
JP22  I2C_PU  [SMT-JUMPER_3_2-NC_TRACE_SILK]  28.3,55.12 180 bottom
JP23  LED  [SMT-JUMPER_2_NC_TRACE_SILK]  15.54,46.51 90 bottom
JP24  LED  [SMT-JUMPER_2_NC_TRACE_SILK]  29.92,49.25 180 bottom
JP25  LED  [SMT-JUMPER_2_NC_TRACE_SILK]  34.68,55.24 0 bottom
JP26  I2C_PU  [SMT-JUMPER_3_2-NC_TRACE_SILK]  54.2,55.12 180 bottom
JP27  LED  [SMT-JUMPER_2_NC_TRACE_SILK]  41.45,46.51 90 bottom
JP28  LED  [SMT-JUMPER_2_NC_TRACE_SILK]  55.83,49.25 180 bottom
JP29  LED  [SMT-JUMPER_2_NC_TRACE_SILK]  60.59,55.24 0 bottom
JP30  I2C_PU  [SMT-JUMPER_3_2-NC_TRACE_SILK]  80.11,55.12 180 bottom
JP31  LED  [SMT-JUMPER_2_NC_TRACE_SILK]  67.36,46.51 90 bottom
JP32  LED  [SMT-JUMPER_2_NC_TRACE_SILK]  81.74,49.25 180 bottom
JP33  LED  [SMT-JUMPER_2_NC_TRACE_SILK]  86.5,55.24 0 bottom
JP34  I2C_PU  [SMT-JUMPER_3_2-NC_TRACE_SILK]  106.02,55.12 180 bottom
JP35  LED  [SMT-JUMPER_2_NC_TRACE_SILK]  93.27,46.51 90 bottom
JP36  LED  [SMT-JUMPER_2_NC_TRACE_SILK]  107.65,49.25 180 bottom
JP37  LED  [SMT-JUMPER_2_NC_TRACE_SILK]  112.41,55.24 0 bottom
JP38  I2C_PU  [SMT-JUMPER_3_2-NC_TRACE_SILK]  131.93,55.12 180 bottom
JP39  LED  [SMT-JUMPER_2_NC_TRACE_SILK]  119.18,46.51 90 bottom
JP40  LED  [SMT-JUMPER_2_NC_TRACE_SILK]  133.55,49.25 180 bottom
JP41  LED  [SMT-JUMPER_2_NC_TRACE_SILK]  8.78,84.96 0 bottom
JP42  I2C_PU  [SMT-JUMPER_3_2-NC_TRACE_SILK]  28.3,84.84 180 bottom
JP43  LED  [SMT-JUMPER_2_NC_TRACE_SILK]  15.54,76.23 90 bottom
JP44  LED  [SMT-JUMPER_2_NC_TRACE_SILK]  29.92,78.97 180 bottom
JP45  LED  [SMT-JUMPER_2_NC_TRACE_SILK]  34.68,84.96 0 bottom
JP46  I2C_PU  [SMT-JUMPER_3_2-NC_TRACE_SILK]  54.2,84.84 180 bottom
JP47  LED  [SMT-JUMPER_2_NC_TRACE_SILK]  41.45,76.23 90 bottom
JP48  LED  [SMT-JUMPER_2_NC_TRACE_SILK]  55.83,78.97 180 bottom
JP49  LED  [SMT-JUMPER_2_NC_TRACE_SILK]  60.59,84.96 0 bottom
JP50  I2C_PU  [SMT-JUMPER_3_2-NC_TRACE_SILK]  80.11,84.84 180 bottom
JP51  LED  [SMT-JUMPER_2_NC_TRACE_SILK]  67.36,76.23 90 bottom
JP52  LED  [SMT-JUMPER_2_NC_TRACE_SILK]  81.74,78.97 180 bottom
JP53  LED  [SMT-JUMPER_2_NC_TRACE_SILK]  86.5,84.96 0 bottom
JP54  I2C_PU  [SMT-JUMPER_3_2-NC_TRACE_SILK]  106.02,84.84 180 bottom
JP55  LED  [SMT-JUMPER_2_NC_TRACE_SILK]  93.27,76.23 90 bottom
JP56  LED  [SMT-JUMPER_2_NC_TRACE_SILK]  107.65,78.97 180 bottom
JP57  LED  [SMT-JUMPER_2_NC_TRACE_SILK]  112.41,84.96 0 bottom
JP58  I2C_PU  [SMT-JUMPER_3_2-NC_TRACE_SILK]  131.93,84.84 180 bottom
JP59  LED  [SMT-JUMPER_2_NC_TRACE_SILK]  119.18,76.23 90 bottom
JP60  LED  [SMT-JUMPER_2_NC_TRACE_SILK]  133.55,78.97 180 bottom
JP61  LED  [SMT-JUMPER_2_NC_TRACE_SILK]  8.78,114.68 0 bottom
JP62  I2C_PU  [SMT-JUMPER_3_2-NC_TRACE_SILK]  28.3,114.55 180 bottom
JP63  LED  [SMT-JUMPER_2_NC_TRACE_SILK]  15.54,105.95 90 bottom
JP64  LED  [SMT-JUMPER_2_NC_TRACE_SILK]  29.92,108.69 180 bottom
JP65  LED  [SMT-JUMPER_2_NC_TRACE_SILK]  34.68,114.68 0 bottom
JP66  I2C_PU  [SMT-JUMPER_3_2-NC_TRACE_SILK]  54.2,114.55 180 bottom
JP67  LED  [SMT-JUMPER_2_NC_TRACE_SILK]  41.45,105.95 90 bottom
JP68  LED  [SMT-JUMPER_2_NC_TRACE_SILK]  55.83,108.69 180 bottom
JP69  LED  [SMT-JUMPER_2_NC_TRACE_SILK]  60.59,114.68 0 bottom
JP70  I2C_PU  [SMT-JUMPER_3_2-NC_TRACE_SILK]  80.11,114.55 180 bottom
JP71  LED  [SMT-JUMPER_2_NC_TRACE_SILK]  67.36,105.95 90 bottom
JP72  LED  [SMT-JUMPER_2_NC_TRACE_SILK]  81.74,108.69 180 bottom
JP73  LED  [SMT-JUMPER_2_NC_TRACE_SILK]  86.5,114.68 0 bottom
JP74  I2C_PU  [SMT-JUMPER_3_2-NC_TRACE_SILK]  106.02,114.55 180 bottom
JP75  LED  [SMT-JUMPER_2_NC_TRACE_SILK]  93.27,105.95 90 bottom
JP76  LED  [SMT-JUMPER_2_NC_TRACE_SILK]  107.65,108.69 180 bottom
JP77  LED  [SMT-JUMPER_2_NC_TRACE_SILK]  112.41,114.68 0 bottom
JP78  I2C_PU  [SMT-JUMPER_3_2-NC_TRACE_SILK]  131.93,114.55 180 bottom
JP79  LED  [SMT-JUMPER_2_NC_TRACE_SILK]  119.18,105.95 90 bottom
JP80  LED  [SMT-JUMPER_2_NC_TRACE_SILK]  133.55,108.69 180 bottom
JP81  LED  [SMT-JUMPER_2_NC_TRACE_SILK]  8.78,144.4 0 bottom
JP82  I2C_PU  [SMT-JUMPER_3_2-NC_TRACE_SILK]  28.3,144.27 180 bottom
JP83  LED  [SMT-JUMPER_2_NC_TRACE_SILK]  15.54,135.67 90 bottom
JP84  LED  [SMT-JUMPER_2_NC_TRACE_SILK]  29.92,138.4 180 bottom
JP85  LED  [SMT-JUMPER_2_NC_TRACE_SILK]  34.68,144.4 0 bottom
JP86  I2C_PU  [SMT-JUMPER_3_2-NC_TRACE_SILK]  54.2,144.27 180 bottom
JP87  LED  [SMT-JUMPER_2_NC_TRACE_SILK]  41.45,135.67 90 bottom
JP88  LED  [SMT-JUMPER_2_NC_TRACE_SILK]  55.83,138.4 180 bottom
JP89  LED  [SMT-JUMPER_2_NC_TRACE_SILK]  60.59,144.4 0 bottom
JP90  I2C_PU  [SMT-JUMPER_3_2-NC_TRACE_SILK]  80.11,144.27 180 bottom
JP91  LED  [SMT-JUMPER_2_NC_TRACE_SILK]  67.36,135.67 90 bottom
JP92  LED  [SMT-JUMPER_2_NC_TRACE_SILK]  81.74,138.4 180 bottom
JP93  LED  [SMT-JUMPER_2_NC_TRACE_SILK]  86.5,144.4 0 bottom
JP94  I2C_PU  [SMT-JUMPER_3_2-NC_TRACE_SILK]  106.02,144.27 180 bottom
JP95  LED  [SMT-JUMPER_2_NC_TRACE_SILK]  93.27,135.67 90 bottom
JP96  LED  [SMT-JUMPER_2_NC_TRACE_SILK]  107.65,138.4 180 bottom
JP97  LED  [SMT-JUMPER_2_NC_TRACE_SILK]  112.41,144.4 0 bottom
JP98  I2C_PU  [SMT-JUMPER_3_2-NC_TRACE_SILK]  131.93,144.27 180 bottom
JP99  LED  [SMT-JUMPER_2_NC_TRACE_SILK]  119.18,135.67 90 bottom
JP100  LED  [SMT-JUMPER_2_NC_TRACE_SILK]  133.55,138.4 180 bottom
JP101  LED  [SMT-JUMPER_2_NC_TRACE_SILK]  8.78,174.12 0 bottom
JP102  I2C_PU  [SMT-JUMPER_3_2-NC_TRACE_SILK]  28.3,173.99 180 bottom
JP103  LED  [SMT-JUMPER_2_NC_TRACE_SILK]  15.54,165.38 90 bottom
JP104  LED  [SMT-JUMPER_2_NC_TRACE_SILK]  29.92,168.12 180 bottom
JP105  LED  [SMT-JUMPER_2_NC_TRACE_SILK]  34.68,174.12 0 bottom
JP106  I2C_PU  [SMT-JUMPER_3_2-NC_TRACE_SILK]  54.2,173.99 180 bottom
JP107  LED  [SMT-JUMPER_2_NC_TRACE_SILK]  41.45,165.38 90 bottom
JP108  LED  [SMT-JUMPER_2_NC_TRACE_SILK]  55.83,168.12 180 bottom
JP109  LED  [SMT-JUMPER_2_NC_TRACE_SILK]  60.59,174.12 0 bottom
JP110  I2C_PU  [SMT-JUMPER_3_2-NC_TRACE_SILK]  80.11,173.99 180 bottom
JP111  LED  [SMT-JUMPER_2_NC_TRACE_SILK]  67.36,165.38 90 bottom
JP112  LED  [SMT-JUMPER_2_NC_TRACE_SILK]  81.74,168.12 180 bottom
JP113  LED  [SMT-JUMPER_2_NC_TRACE_SILK]  86.5,174.12 0 bottom
JP114  I2C_PU  [SMT-JUMPER_3_2-NC_TRACE_SILK]  106.02,173.99 180 bottom
JP115  LED  [SMT-JUMPER_2_NC_TRACE_SILK]  93.27,165.38 90 bottom
JP116  LED  [SMT-JUMPER_2_NC_TRACE_SILK]  107.65,168.12 180 bottom
JP117  LED  [SMT-JUMPER_2_NC_TRACE_SILK]  112.41,174.12 0 bottom
JP118  I2C_PU  [SMT-JUMPER_3_2-NC_TRACE_SILK]  131.93,173.99 180 bottom
JP119  LED  [SMT-JUMPER_2_NC_TRACE_SILK]  119.18,165.38 90 bottom
JP120  LED  [SMT-JUMPER_2_NC_TRACE_SILK]  133.55,168.12 180 bottom
LOGO1  OSHW-LOGOS  [OSHW-LOGO-S]  35.56,33.02 0 bottom
LOGO2  OSHW-LOGOS  [OSHW-LOGO-S]  9.65,33.02 0 bottom
LOGO3  SFE_LOGO_FLAME.1_INCH  [SFE_LOGO_FLAME_.1]  55.63,33.02 0 top
LOGO4  SFE_LOGO_FLAME.1_INCH  [SFE_LOGO_FLAME_.1]  29.72,33.02 0 top
LOGO5  OSHW-LOGOS  [OSHW-LOGO-S]  61.47,33.02 0 bottom
LOGO6  SFE_LOGO_FLAME.1_INCH  [SFE_LOGO_FLAME_.1]  81.53,33.02 0 top
LOGO7  OSHW-LOGOS  [OSHW-LOGO-S]  87.38,33.02 0 bottom
LOGO8  SFE_LOGO_FLAME.1_INCH  [SFE_LOGO_FLAME_.1]  107.44,33.02 0 top
LOGO9  OSHW-LOGOS  [OSHW-LOGO-S]  113.28,33.02 0 bottom
LOGO10  SFE_LOGO_FLAME.1_INCH  [SFE_LOGO_FLAME_.1]  133.35,33.02 0 top
LOGO11  OSHW-LOGOS  [OSHW-LOGO-S]  9.65,62.74 0 bottom
LOGO12  SFE_LOGO_FLAME.1_INCH  [SFE_LOGO_FLAME_.1]  29.72,62.74 0 top
LOGO13  OSHW-LOGOS  [OSHW-LOGO-S]  35.56,62.74 0 bottom
LOGO14  SFE_LOGO_FLAME.1_INCH  [SFE_LOGO_FLAME_.1]  55.63,62.74 0 top
LOGO15  OSHW-LOGOS  [OSHW-LOGO-S]  61.47,62.74 0 bottom
LOGO16  SFE_LOGO_FLAME.1_INCH  [SFE_LOGO_FLAME_.1]  81.53,62.74 0 top
LOGO17  OSHW-LOGOS  [OSHW-LOGO-S]  87.38,62.74 0 bottom
LOGO18  SFE_LOGO_FLAME.1_INCH  [SFE_LOGO_FLAME_.1]  107.44,62.74 0 top
LOGO19  OSHW-LOGOS  [OSHW-LOGO-S]  113.28,62.74 0 bottom
LOGO20  SFE_LOGO_FLAME.1_INCH  [SFE_LOGO_FLAME_.1]  133.35,62.74 0 top
LOGO21  OSHW-LOGOS  [OSHW-LOGO-S]  9.65,92.46 0 bottom
LOGO22  SFE_LOGO_FLAME.1_INCH  [SFE_LOGO_FLAME_.1]  29.72,92.46 0 top
LOGO23  OSHW-LOGOS  [OSHW-LOGO-S]  35.56,92.46 0 bottom
LOGO24  SFE_LOGO_FLAME.1_INCH  [SFE_LOGO_FLAME_.1]  55.63,92.46 0 top
LOGO25  OSHW-LOGOS  [OSHW-LOGO-S]  61.47,92.46 0 bottom
LOGO26  SFE_LOGO_FLAME.1_INCH  [SFE_LOGO_FLAME_.1]  81.53,92.46 0 top
LOGO27  OSHW-LOGOS  [OSHW-LOGO-S]  87.38,92.46 0 bottom
LOGO28  SFE_LOGO_FLAME.1_INCH  [SFE_LOGO_FLAME_.1]  107.44,92.46 0 top
LOGO29  OSHW-LOGOS  [OSHW-LOGO-S]  113.28,92.46 0 bottom
LOGO30  SFE_LOGO_FLAME.1_INCH  [SFE_LOGO_FLAME_.1]  133.35,92.46 0 top
LOGO31  OSHW-LOGOS  [OSHW-LOGO-S]  9.65,122.17 0 bottom
LOGO32  SFE_LOGO_FLAME.1_INCH  [SFE_LOGO_FLAME_.1]  29.72,122.17 0 top
LOGO33  OSHW-LOGOS  [OSHW-LOGO-S]  35.56,122.17 0 bottom
LOGO34  SFE_LOGO_FLAME.1_INCH  [SFE_LOGO_FLAME_.1]  55.63,122.17 0 top
LOGO35  OSHW-LOGOS  [OSHW-LOGO-S]  61.47,122.17 0 bottom
LOGO36  SFE_LOGO_FLAME.1_INCH  [SFE_LOGO_FLAME_.1]  81.53,122.17 0 top
LOGO37  OSHW-LOGOS  [OSHW-LOGO-S]  87.38,122.17 0 bottom
LOGO38  SFE_LOGO_FLAME.1_INCH  [SFE_LOGO_FLAME_.1]  107.44,122.17 0 top
LOGO39  OSHW-LOGOS  [OSHW-LOGO-S]  113.28,122.17 0 bottom
LOGO40  SFE_LOGO_FLAME.1_INCH  [SFE_LOGO_FLAME_.1]  133.35,122.17 0 top
LOGO41  OSHW-LOGOS  [OSHW-LOGO-S]  9.65,151.89 0 bottom
LOGO42  SFE_LOGO_FLAME.1_INCH  [SFE_LOGO_FLAME_.1]  29.72,151.89 0 top
LOGO43  OSHW-LOGOS  [OSHW-LOGO-S]  35.56,151.89 0 bottom
LOGO44  SFE_LOGO_FLAME.1_INCH  [SFE_LOGO_FLAME_.1]  55.63,151.89 0 top
LOGO45  OSHW-LOGOS  [OSHW-LOGO-S]  61.47,151.89 0 bottom
LOGO46  SFE_LOGO_FLAME.1_INCH  [SFE_LOGO_FLAME_.1]  81.53,151.89 0 top
LOGO47  OSHW-LOGOS  [OSHW-LOGO-S]  87.38,151.89 0 bottom
LOGO48  SFE_LOGO_FLAME.1_INCH  [SFE_LOGO_FLAME_.1]  107.44,151.89 0 top
LOGO49  OSHW-LOGOS  [OSHW-LOGO-S]  113.28,151.89 0 bottom
LOGO50  SFE_LOGO_FLAME.1_INCH  [SFE_LOGO_FLAME_.1]  133.35,151.89 0 top
LOGO51  OSHW-LOGOS  [OSHW-LOGO-S]  9.65,181.61 0 bottom
LOGO52  SFE_LOGO_FLAME.1_INCH  [SFE_LOGO_FLAME_.1]  29.72,181.61 0 top
LOGO53  OSHW-LOGOS  [OSHW-LOGO-S]  35.56,181.61 0 bottom
LOGO54  SFE_LOGO_FLAME.1_INCH  [SFE_LOGO_FLAME_.1]  55.63,181.61 0 top
LOGO55  OSHW-LOGOS  [OSHW-LOGO-S]  61.47,181.61 0 bottom
LOGO56  SFE_LOGO_FLAME.1_INCH  [SFE_LOGO_FLAME_.1]  81.53,181.61 0 top
LOGO57  OSHW-LOGOS  [OSHW-LOGO-S]  87.38,181.61 0 bottom
LOGO58  SFE_LOGO_FLAME.1_INCH  [SFE_LOGO_FLAME_.1]  107.44,181.61 0 top
LOGO59  OSHW-LOGOS  [OSHW-LOGO-S]  113.28,181.61 0 bottom
LOGO60  SFE_LOGO_FLAME.1_INCH  [SFE_LOGO_FLAME_.1]  133.35,181.61 0 top
M1  G1040003D_LRA_CASTELLATED  [COIN_VIBRATION_MOTOR_CASTEL]  19.56,29.95 270 top
M2  G1040003D_LRA_CASTELLATED  [COIN_VIBRATION_MOTOR_CASTEL]  45.47,29.95 270 top
M3  G1040003D_LRA_CASTELLATED  [COIN_VIBRATION_MOTOR_CASTEL]  71.37,29.95 270 top
M4  G1040003D_LRA_CASTELLATED  [COIN_VIBRATION_MOTOR_CASTEL]  97.28,29.95 270 top
M5  G1040003D_LRA_CASTELLATED  [COIN_VIBRATION_MOTOR_CASTEL]  123.19,29.95 270 top
M6  G1040003D_LRA_CASTELLATED  [COIN_VIBRATION_MOTOR_CASTEL]  19.56,59.67 270 top
M7  G1040003D_LRA_CASTELLATED  [COIN_VIBRATION_MOTOR_CASTEL]  45.47,59.67 270 top
M8  G1040003D_LRA_CASTELLATED  [COIN_VIBRATION_MOTOR_CASTEL]  71.37,59.67 270 top
M9  G1040003D_LRA_CASTELLATED  [COIN_VIBRATION_MOTOR_CASTEL]  97.28,59.67 270 top
M10  G1040003D_LRA_CASTELLATED  [COIN_VIBRATION_MOTOR_CASTEL]  123.19,59.67 270 top
M11  G1040003D_LRA_CASTELLATED  [COIN_VIBRATION_MOTOR_CASTEL]  19.56,89.38 270 top
M12  G1040003D_LRA_CASTELLATED  [COIN_VIBRATION_MOTOR_CASTEL]  45.47,89.38 270 top
M13  G1040003D_LRA_CASTELLATED  [COIN_VIBRATION_MOTOR_CASTEL]  71.37,89.38 270 top
M14  G1040003D_LRA_CASTELLATED  [COIN_VIBRATION_MOTOR_CASTEL]  97.28,89.38 270 top
M15  G1040003D_LRA_CASTELLATED  [COIN_VIBRATION_MOTOR_CASTEL]  123.19,89.38 270 top
M16  G1040003D_LRA_CASTELLATED  [COIN_VIBRATION_MOTOR_CASTEL]  19.56,119.1 270 top
M17  G1040003D_LRA_CASTELLATED  [COIN_VIBRATION_MOTOR_CASTEL]  45.47,119.1 270 top
M18  G1040003D_LRA_CASTELLATED  [COIN_VIBRATION_MOTOR_CASTEL]  71.37,119.1 270 top
M19  G1040003D_LRA_CASTELLATED  [COIN_VIBRATION_MOTOR_CASTEL]  97.28,119.1 270 top
M20  G1040003D_LRA_CASTELLATED  [COIN_VIBRATION_MOTOR_CASTEL]  123.19,119.1 270 top
M21  G1040003D_LRA_CASTELLATED  [COIN_VIBRATION_MOTOR_CASTEL]  19.56,148.82 270 top
M22  G1040003D_LRA_CASTELLATED  [COIN_VIBRATION_MOTOR_CASTEL]  45.47,148.82 270 top
M23  G1040003D_LRA_CASTELLATED  [COIN_VIBRATION_MOTOR_CASTEL]  71.37,148.82 270 top
M24  G1040003D_LRA_CASTELLATED  [COIN_VIBRATION_MOTOR_CASTEL]  97.28,148.82 270 top
M25  G1040003D_LRA_CASTELLATED  [COIN_VIBRATION_MOTOR_CASTEL]  123.19,148.82 270 top
M26  G1040003D_LRA_CASTELLATED  [COIN_VIBRATION_MOTOR_CASTEL]  19.56,178.54 270 top
M27  G1040003D_LRA_CASTELLATED  [COIN_VIBRATION_MOTOR_CASTEL]  45.47,178.54 270 top
M28  G1040003D_LRA_CASTELLATED  [COIN_VIBRATION_MOTOR_CASTEL]  71.37,178.54 270 top
M29  G1040003D_LRA_CASTELLATED  [COIN_VIBRATION_MOTOR_CASTEL]  97.28,178.54 270 top
M30  G1040003D_LRA_CASTELLATED  [COIN_VIBRATION_MOTOR_CASTEL]  123.19,178.54 270 top
R1  4.7k  [0603]  29.08,25.19 90 top
R2  4.7k  [0603]  27.43,25.19 90 top
R3  10k  [0603]  29.87,14.99 180 top
R4  1k  [0603]  8.25,25.23 270 top
R5  4.7k  [0603]  54.99,25.19 90 top
R6  4.7k  [0603]  53.34,25.19 90 top
R7  1k  [0603]  34.16,25.23 270 top
R8  10k  [0603]  55.78,14.99 180 top
R9  4.7k  [0603]  80.9,25.19 90 top
R10  4.7k  [0603]  79.25,25.19 90 top
R11  1k  [0603]  60.07,25.23 270 top
R12  10k  [0603]  81.69,14.99 180 top
R13  4.7k  [0603]  106.81,25.19 90 top
R14  4.7k  [0603]  105.16,25.19 90 top
R15  1k  [0603]  85.98,25.23 270 top
R16  10k  [0603]  107.59,14.99 180 top
R17  4.7k  [0603]  132.72,25.19 90 top
R18  4.7k  [0603]  131.06,25.19 90 top
R19  1k  [0603]  111.89,25.23 270 top
R20  10k  [0603]  133.5,14.99 180 top
R21  4.7k  [0603]  29.08,54.9 90 top
R22  4.7k  [0603]  27.43,54.9 90 top
R23  1k  [0603]  8.25,54.95 270 top
R24  10k  [0603]  29.87,44.7 180 top
R25  4.7k  [0603]  54.99,54.9 90 top
R26  4.7k  [0603]  53.34,54.9 90 top
R27  1k  [0603]  34.16,54.95 270 top
R28  10k  [0603]  55.78,44.7 180 top
R29  4.7k  [0603]  80.9,54.9 90 top
R30  4.7k  [0603]  79.25,54.9 90 top
R31  1k  [0603]  60.07,54.95 270 top
R32  10k  [0603]  81.69,44.7 180 top
R33  4.7k  [0603]  106.81,54.9 90 top
R34  4.7k  [0603]  105.16,54.9 90 top
R35  1k  [0603]  85.98,54.95 270 top
R36  10k  [0603]  107.59,44.7 180 top
R37  4.7k  [0603]  132.72,54.9 90 top
R38  4.7k  [0603]  131.06,54.9 90 top
R39  1k  [0603]  111.89,54.95 270 top
R40  10k  [0603]  133.5,44.7 180 top
R41  4.7k  [0603]  29.08,84.62 90 top
R42  4.7k  [0603]  27.43,84.62 90 top
R43  1k  [0603]  8.25,84.67 270 top
R44  10k  [0603]  29.87,74.42 180 top
R45  4.7k  [0603]  54.99,84.62 90 top
R46  4.7k  [0603]  53.34,84.62 90 top
R47  1k  [0603]  34.16,84.67 270 top
R48  10k  [0603]  55.78,74.42 180 top
R49  4.7k  [0603]  80.9,84.62 90 top
R50  4.7k  [0603]  79.25,84.62 90 top
R51  1k  [0603]  60.07,84.67 270 top
R52  10k  [0603]  81.69,74.42 180 top
R53  4.7k  [0603]  106.81,84.62 90 top
R54  4.7k  [0603]  105.16,84.62 90 top
R55  1k  [0603]  85.98,84.67 270 top
R56  10k  [0603]  107.59,74.42 180 top
R57  4.7k  [0603]  132.72,84.62 90 top
R58  4.7k  [0603]  131.06,84.62 90 top
R59  1k  [0603]  111.89,84.67 270 top
R60  10k  [0603]  133.5,74.42 180 top
R61  4.7k  [0603]  29.08,114.34 90 top
R62  4.7k  [0603]  27.43,114.34 90 top
R63  1k  [0603]  8.25,114.39 270 top
R64  10k  [0603]  29.87,104.14 180 top
R65  4.7k  [0603]  54.99,114.34 90 top
R66  4.7k  [0603]  53.34,114.34 90 top
R67  1k  [0603]  34.16,114.39 270 top
R68  10k  [0603]  55.78,104.14 180 top
R69  4.7k  [0603]  80.9,114.34 90 top
R70  4.7k  [0603]  79.25,114.34 90 top
R71  1k  [0603]  60.07,114.39 270 top
R72  10k  [0603]  81.69,104.14 180 top
R73  4.7k  [0603]  106.81,114.34 90 top
R74  4.7k  [0603]  105.16,114.34 90 top
R75  1k  [0603]  85.98,114.39 270 top
R76  10k  [0603]  107.59,104.14 180 top
R77  4.7k  [0603]  132.72,114.34 90 top
R78  4.7k  [0603]  131.06,114.34 90 top
R79  1k  [0603]  111.89,114.39 270 top
R80  10k  [0603]  133.5,104.14 180 top
R81  4.7k  [0603]  29.08,144.06 90 top
R82  4.7k  [0603]  27.43,144.06 90 top
R83  1k  [0603]  8.25,144.11 270 top
R84  10k  [0603]  29.87,133.86 180 top
R85  4.7k  [0603]  54.99,144.06 90 top
R86  4.7k  [0603]  53.34,144.06 90 top
R87  1k  [0603]  34.16,144.11 270 top
R88  10k  [0603]  55.78,133.86 180 top
R89  4.7k  [0603]  80.9,144.06 90 top
R90  4.7k  [0603]  79.25,144.06 90 top
R91  1k  [0603]  60.07,144.11 270 top
R92  10k  [0603]  81.69,133.86 180 top
R93  4.7k  [0603]  106.81,144.06 90 top
R94  4.7k  [0603]  105.16,144.06 90 top
R95  1k  [0603]  85.98,144.11 270 top
R96  10k  [0603]  107.59,133.86 180 top
R97  4.7k  [0603]  132.72,144.06 90 top
R98  4.7k  [0603]  131.06,144.06 90 top
R99  1k  [0603]  111.89,144.11 270 top
R100  10k  [0603]  133.5,133.86 180 top
R101  4.7k  [0603]  29.08,173.78 90 top
R102  4.7k  [0603]  27.43,173.78 90 top
R103  1k  [0603]  8.25,173.82 270 top
R104  10k  [0603]  29.87,163.58 180 top
R105  4.7k  [0603]  54.99,173.78 90 top
R106  4.7k  [0603]  53.34,173.78 90 top
R107  1k  [0603]  34.16,173.82 270 top
R108  10k  [0603]  55.78,163.58 180 top
R109  4.7k  [0603]  80.9,173.78 90 top
R110  4.7k  [0603]  79.25,173.78 90 top
R111  1k  [0603]  60.07,173.82 270 top
R112  10k  [0603]  81.69,163.58 180 top
R113  4.7k  [0603]  106.81,173.78 90 top
R114  4.7k  [0603]  105.16,173.78 90 top
R115  1k  [0603]  85.98,173.82 270 top
R116  10k  [0603]  107.59,163.58 180 top
R117  4.7k  [0603]  132.72,173.78 90 top
R118  4.7k  [0603]  131.06,173.78 90 top
R119  1k  [0603]  111.89,173.82 270 top
R120  10k  [0603]  133.5,163.58 180 top
U1  HAPTIC_DRIVER_DA7280  [QFN_DA7280]  19.56,14.73 135 top
U2  HAPTIC_DRIVER_DA7280  [QFN_DA7280]  45.47,14.73 135 top
U3  HAPTIC_DRIVER_DA7280  [QFN_DA7280]  71.37,14.73 135 top
U4  HAPTIC_DRIVER_DA7280  [QFN_DA7280]  97.28,14.73 135 top
U5  HAPTIC_DRIVER_DA7280  [QFN_DA7280]  123.19,14.73 135 top
U6  HAPTIC_DRIVER_DA7280  [QFN_DA7280]  19.56,44.45 135 top
U7  HAPTIC_DRIVER_DA7280  [QFN_DA7280]  45.47,44.45 135 top
U8  HAPTIC_DRIVER_DA7280  [QFN_DA7280]  71.37,44.45 135 top
U9  HAPTIC_DRIVER_DA7280  [QFN_DA7280]  97.28,44.45 135 top
U10  HAPTIC_DRIVER_DA7280  [QFN_DA7280]  123.19,44.45 135 top
U11  HAPTIC_DRIVER_DA7280  [QFN_DA7280]  19.56,74.17 135 top
U12  HAPTIC_DRIVER_DA7280  [QFN_DA7280]  45.47,74.17 135 top
U13  HAPTIC_DRIVER_DA7280  [QFN_DA7280]  71.37,74.17 135 top
U14  HAPTIC_DRIVER_DA7280  [QFN_DA7280]  97.28,74.17 135 top
U15  HAPTIC_DRIVER_DA7280  [QFN_DA7280]  123.19,74.17 135 top
U16  HAPTIC_DRIVER_DA7280  [QFN_DA7280]  19.56,103.89 135 top
U17  HAPTIC_DRIVER_DA7280  [QFN_DA7280]  45.47,103.89 135 top
U18  HAPTIC_DRIVER_DA7280  [QFN_DA7280]  71.37,103.89 135 top
U19  HAPTIC_DRIVER_DA7280  [QFN_DA7280]  97.28,103.89 135 top
U20  HAPTIC_DRIVER_DA7280  [QFN_DA7280]  123.19,103.89 135 top
U21  HAPTIC_DRIVER_DA7280  [QFN_DA7280]  19.56,133.6 135 top
U22  HAPTIC_DRIVER_DA7280  [QFN_DA7280]  45.47,133.6 135 top
U23  HAPTIC_DRIVER_DA7280  [QFN_DA7280]  71.37,133.6 135 top
U24  HAPTIC_DRIVER_DA7280  [QFN_DA7280]  97.28,133.6 135 top
U25  HAPTIC_DRIVER_DA7280  [QFN_DA7280]  123.19,133.6 135 top
U26  HAPTIC_DRIVER_DA7280  [QFN_DA7280]  19.56,163.32 135 top
U27  HAPTIC_DRIVER_DA7280  [QFN_DA7280]  45.47,163.32 135 top
U28  HAPTIC_DRIVER_DA7280  [QFN_DA7280]  71.37,163.32 135 top
U29  HAPTIC_DRIVER_DA7280  [QFN_DA7280]  97.28,163.32 135 top
U30  HAPTIC_DRIVER_DA7280  [QFN_DA7280]  123.19,163.32 135 top
U$1  QWIIC_LOGO_3MM  [QWIIC_3MM]  8.65,15.37 0 top
U$2  [#3V3#1]  15.75,10.79 270 top
U$3  [#GND#0]  13.21,10.79 270 top
U$4  [#GPI0#6]  30.99,10.92 270 top
U$5  [#GPI1#6]  28.45,10.79 270 top
U$6  [#GPI2#6]  25.91,10.92 270 top
U$7  [#VDD#4]  15.75,10.92 90 bottom
U$8  [#SDA#4]  18.29,10.79 270 top
U$9  [HAPTIC6]  24.26,18.03 0 bottom
U$10  [MOTOR7]  27.05,16.38 0 bottom
U$11  [DRIVER8]  20.95,16.26 0 bottom
U$12  [#GPI0#PWM#2]  30.99,13.16 90 bottom
U$13  [#GPI1#2]  28.45,10.79 90 bottom
U$14  [#GPI2#2]  25.91,10.92 90 bottom
U$15  [#VDDIO#5]  11.68,13.72 0 top
U$16  [#SDA#0]  18.29,10.79 90 bottom
U$17  QWIIC_LOGO_3MM  [QWIIC_3MM]  34.56,15.37 0 top
U$18  [#GND#0]  13.21,10.79 90 bottom
U$19  [#SCL#5]  20.83,10.67 270 top
U$20  [PWR72810]  11.18,25.02 270 top
U$21  [#SCL#1]  20.83,10.67 90 bottom
U$22  [#GND#0]  39.12,10.79 270 top
U$23  [#I2C#4]  28.34,23.66 0 bottom
U$24  [#LED#4]  9.1,23.79 0 bottom
U$25  [#VDDIO#5]  11.68,13.72 0 bottom
U$26  [SFE_LOGO_FLAME_.1]  29.59,33.02 0 bottom
U$27  [##INT##3]  23.37,10.54 90 bottom
U$28  [##INT##6]  23.37,10.54 270 top
U$29  [DA72809]  24.26,14.61 0 bottom
U$30  [#IO#6]  13.41,16.81 0 bottom
U$31  [#QISO#0]  29.46,21.11 0 bottom
U$32  [#GPI0#6]  56.9,10.92 270 top
U$33  [#GPI1#6]  54.36,10.79 270 top
U$34  [#GPI2#6]  51.82,10.92 270 top
U$35  [#SDA#4]  44.2,10.79 270 top
U$36  [#GPI0#PWM#2]  56.9,13.16 90 bottom
U$37  [#GPI1#2]  54.36,10.79 90 bottom
U$38  [#GPI2#2]  51.82,10.92 90 bottom
U$39  [#SDA#0]  44.2,10.79 90 bottom
U$40  [#GND#0]  39.12,10.79 90 bottom
U$41  [#SCL#5]  46.74,10.67 270 top
U$42  [PWR72810]  37.08,25.02 270 top
U$43  [#SCL#1]  46.74,10.67 90 bottom
U$44  [#I2C#4]  54.25,23.66 0 bottom
U$45  [#LED#4]  35.01,23.79 0 bottom
U$46  [#3V3#1]  41.66,10.79 270 top
U$47  [SFE_LOGO_FLAME_.1]  55.5,33.02 0 bottom
U$48  [##INT##3]  49.28,10.54 90 bottom
U$49  [##INT##6]  49.28,10.54 270 top
U$50  [#VDD#4]  41.66,10.92 90 bottom
U$51  [#VDDIO#5]  37.59,13.72 0 top
U$52  [#VDDIO#5]  37.59,13.72 0 bottom
U$53  [HAPTIC6]  50.16,18.03 0 bottom
U$54  [MOTOR7]  52.96,16.38 0 bottom
U$55  [DRIVER8]  46.86,16.26 0 bottom
U$56  [DA72809]  50.16,14.61 0 bottom
U$57  [#IO#6]  39.32,16.81 0 bottom
U$58  [#QISO#0]  55.37,21.11 0 bottom
U$59  QWIIC_LOGO_3MM  [QWIIC_3MM]  60.47,15.37 0 top
U$60  [#GND#0]  65.02,10.79 270 top
U$61  [#GPI0#6]  82.8,10.92 270 top
U$62  [#GPI1#6]  80.26,10.79 270 top
U$63  [#GPI2#6]  77.72,10.92 270 top
U$64  [#SDA#4]  70.1,10.79 270 top
U$65  [#GPI0#PWM#2]  82.8,13.16 90 bottom
U$66  [#GPI1#2]  80.26,10.79 90 bottom
U$67  [#GPI2#2]  77.72,10.92 90 bottom
U$68  [#SDA#0]  70.1,10.79 90 bottom
U$69  [#GND#0]  65.02,10.79 90 bottom
U$70  [#SCL#5]  72.64,10.67 270 top